# Altium PCB UL-SWAP-DAQ-1.PcbDoc (part 1 of 2)
Units mil, origin at the board's own origin, x right, y up, seen from the top; angles counter-clockwise.
Board outline 2730 x 3320 mil, 4 copper layers (Top Layer, GND, PWR, Bottom Layer), stack 23.756 mil thick; 102 components, 111 nets, 461 pads, 104 vias.
Unrouted connection lines stored in the file: 58.
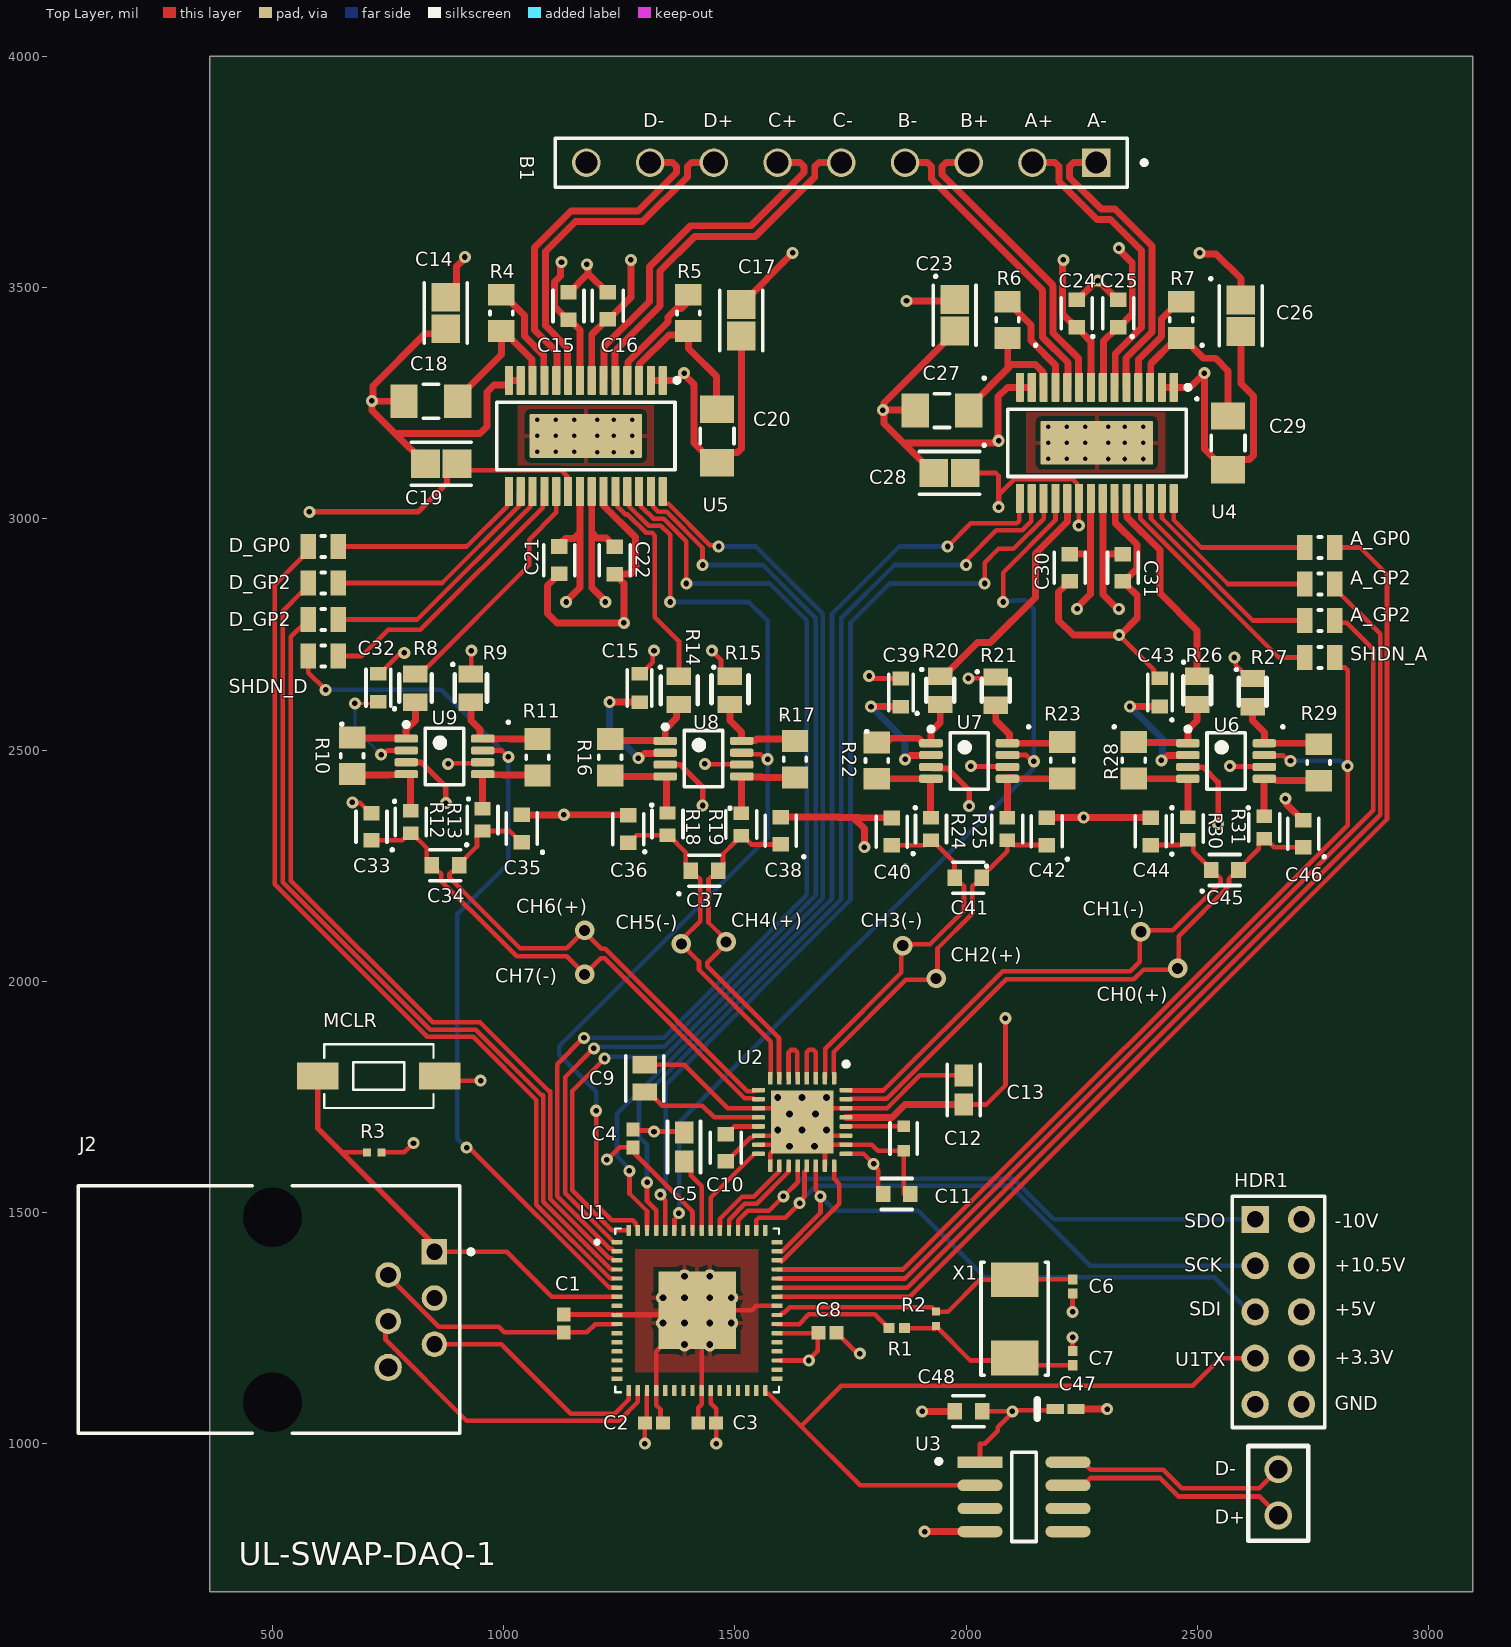
[diagram p0: Top Layer view]
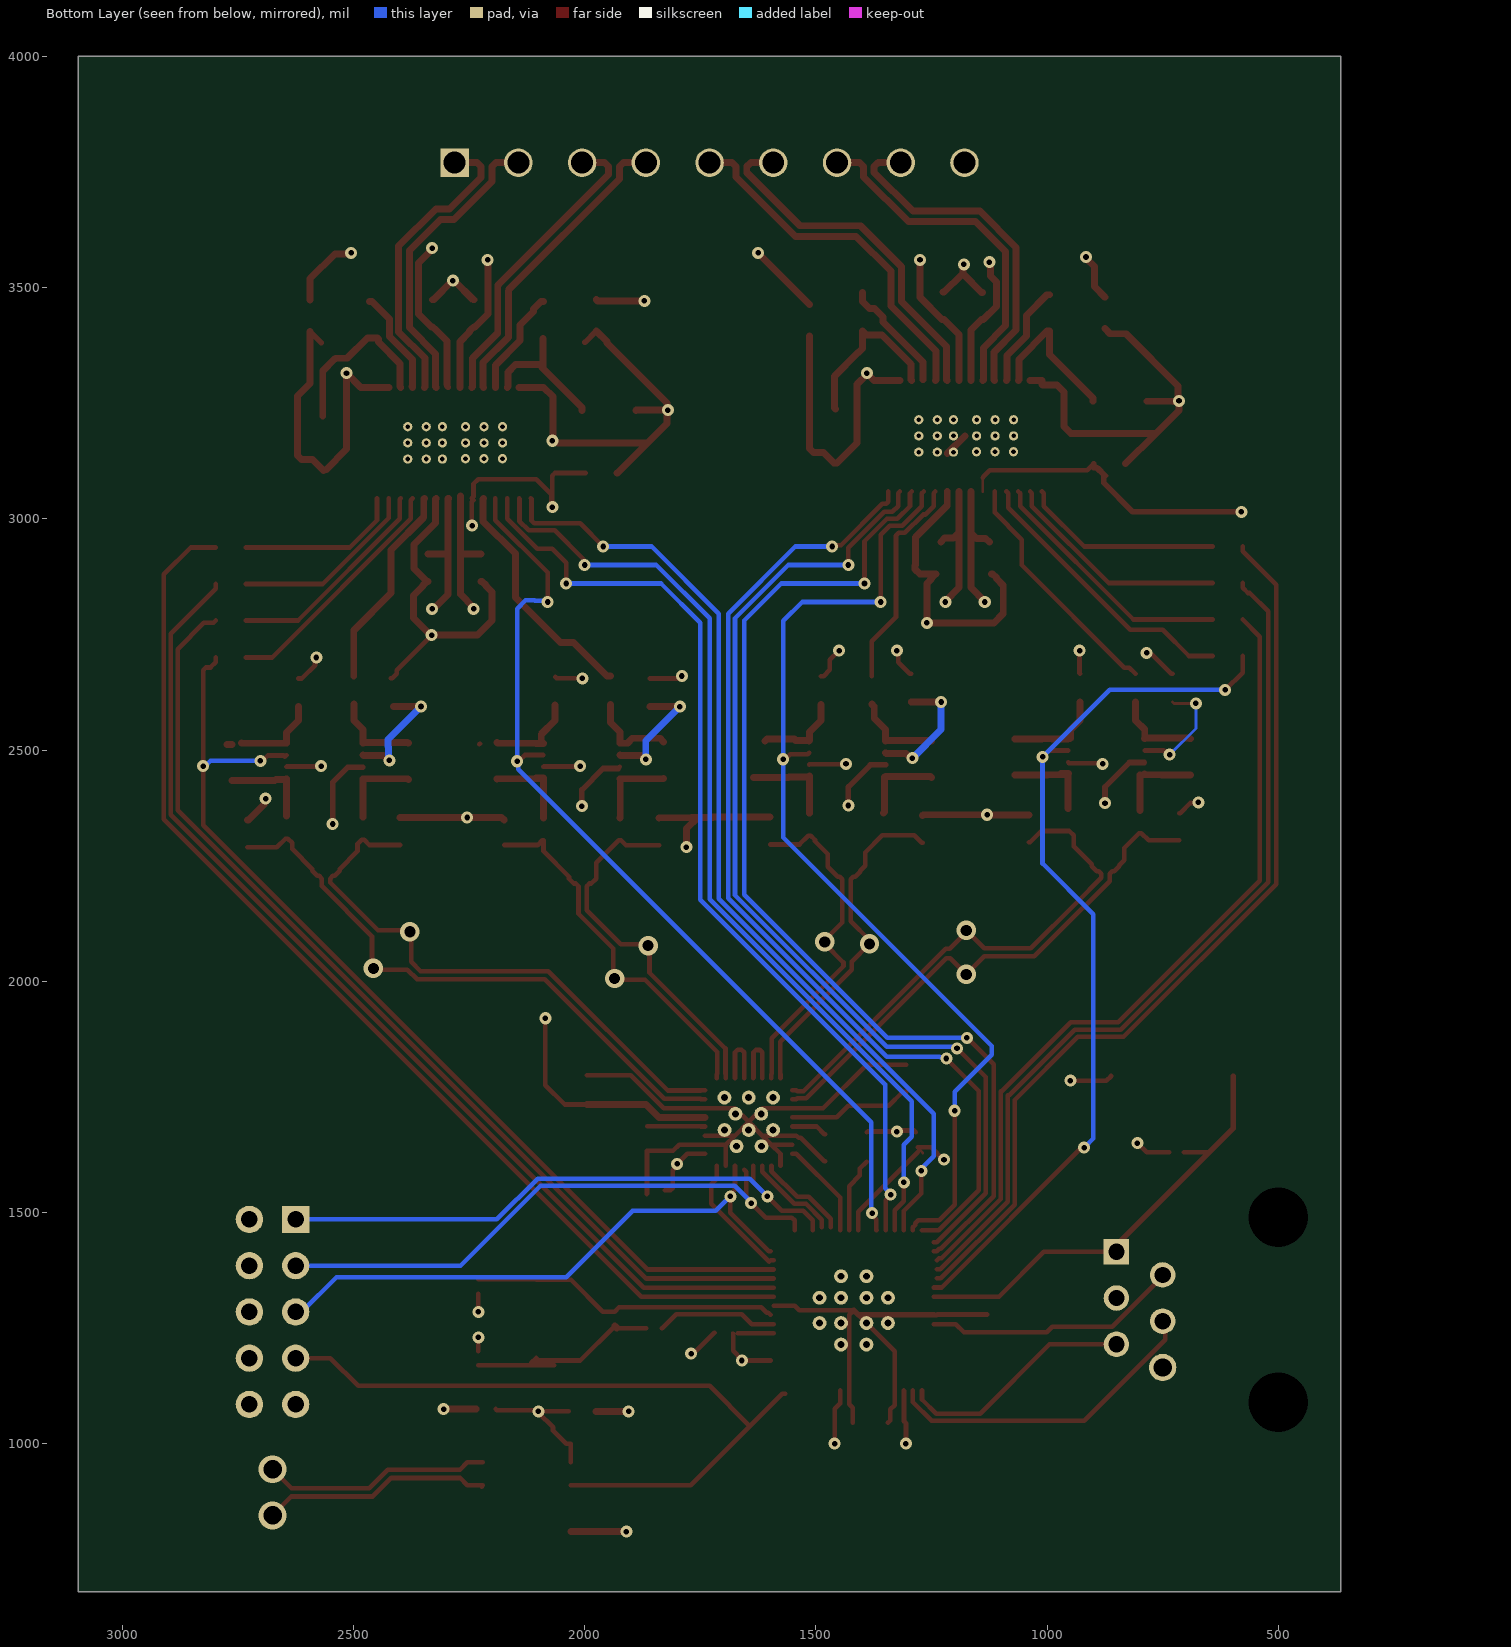
[diagram p1: Bottom Layer view, seen from below]
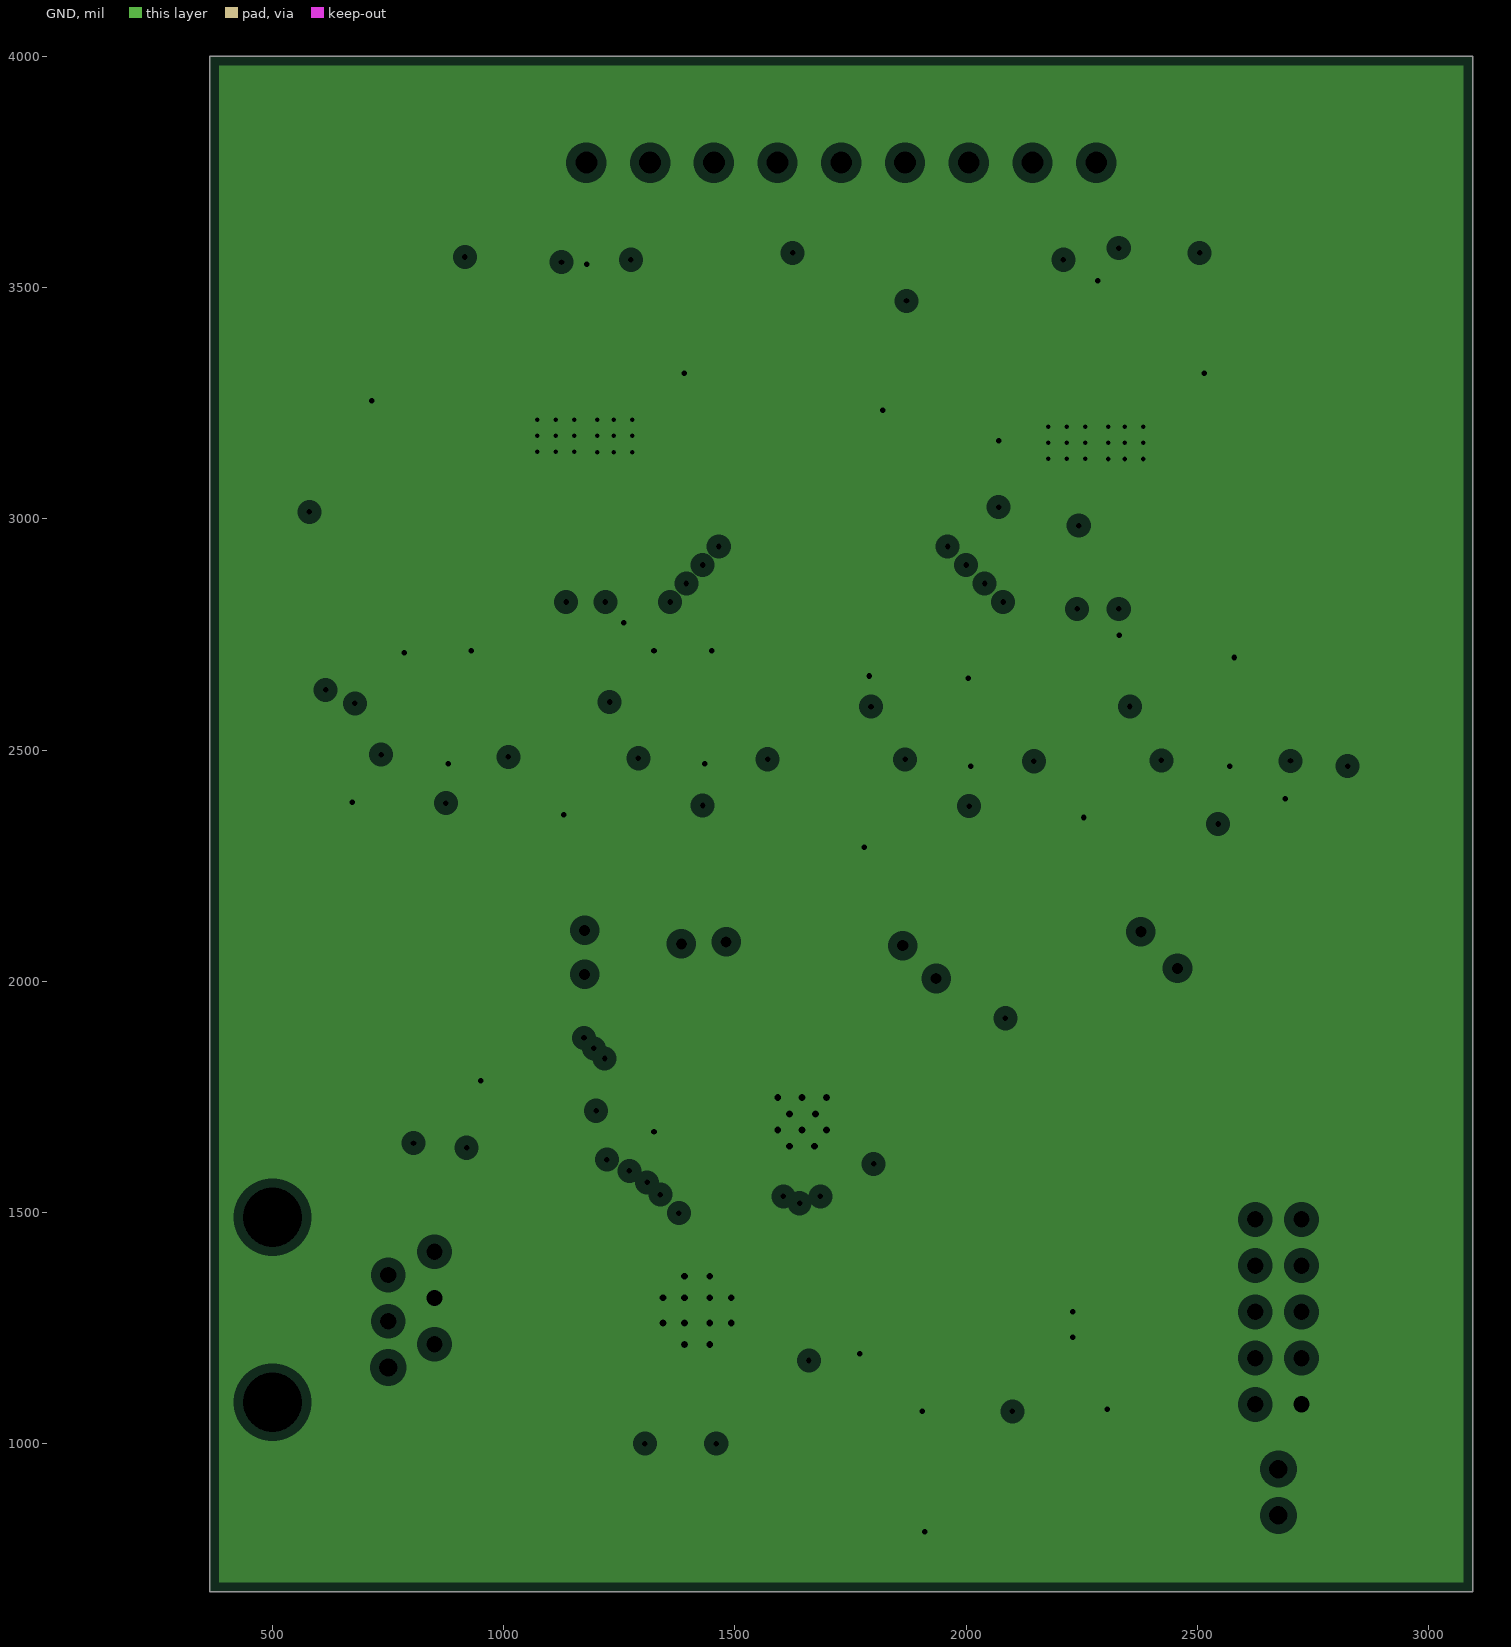
[diagram p2: GND, clearances drawn from the general rule]
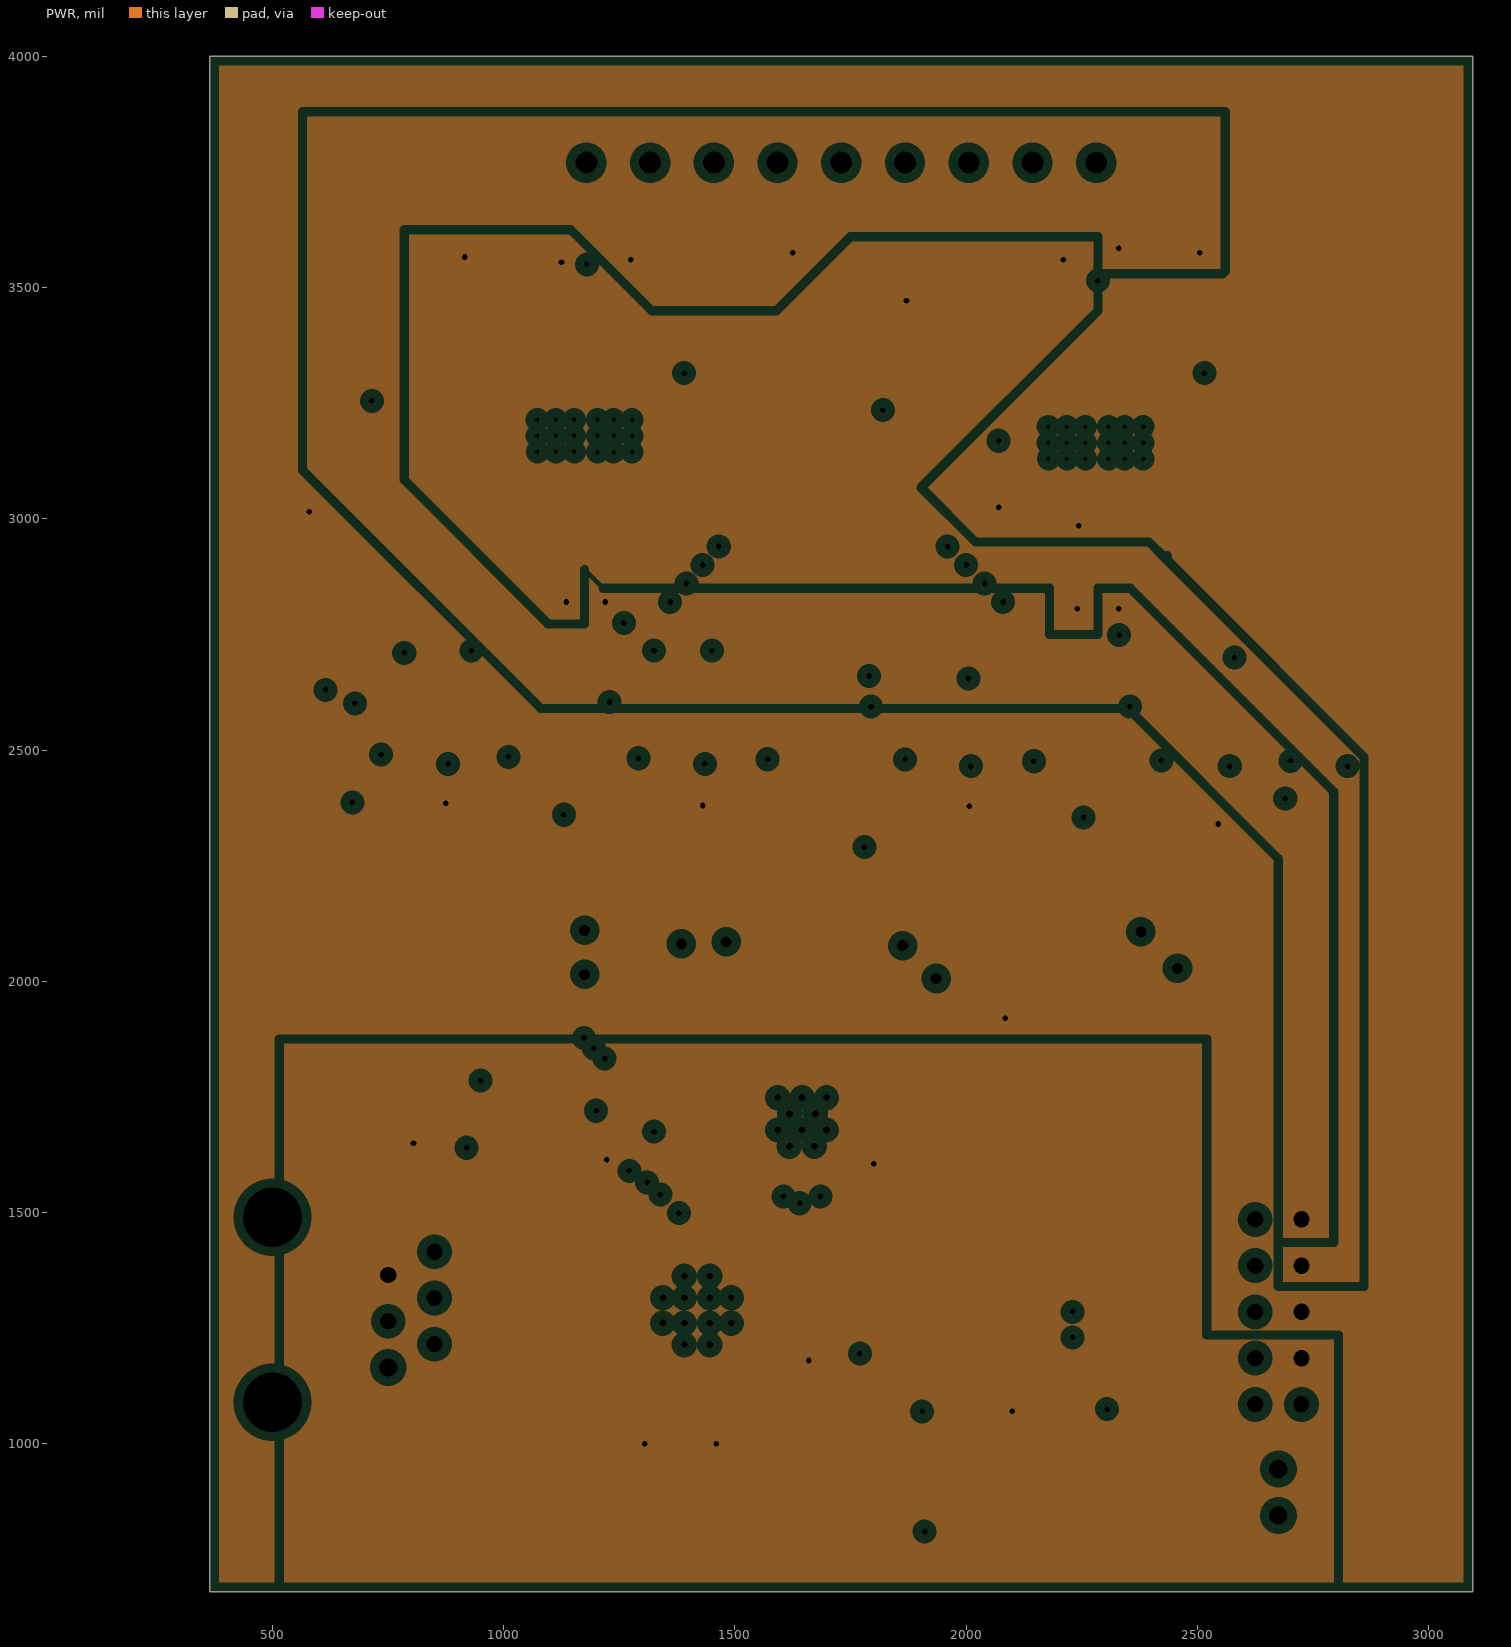
[diagram p3: PWR, clearances drawn from the general rule]
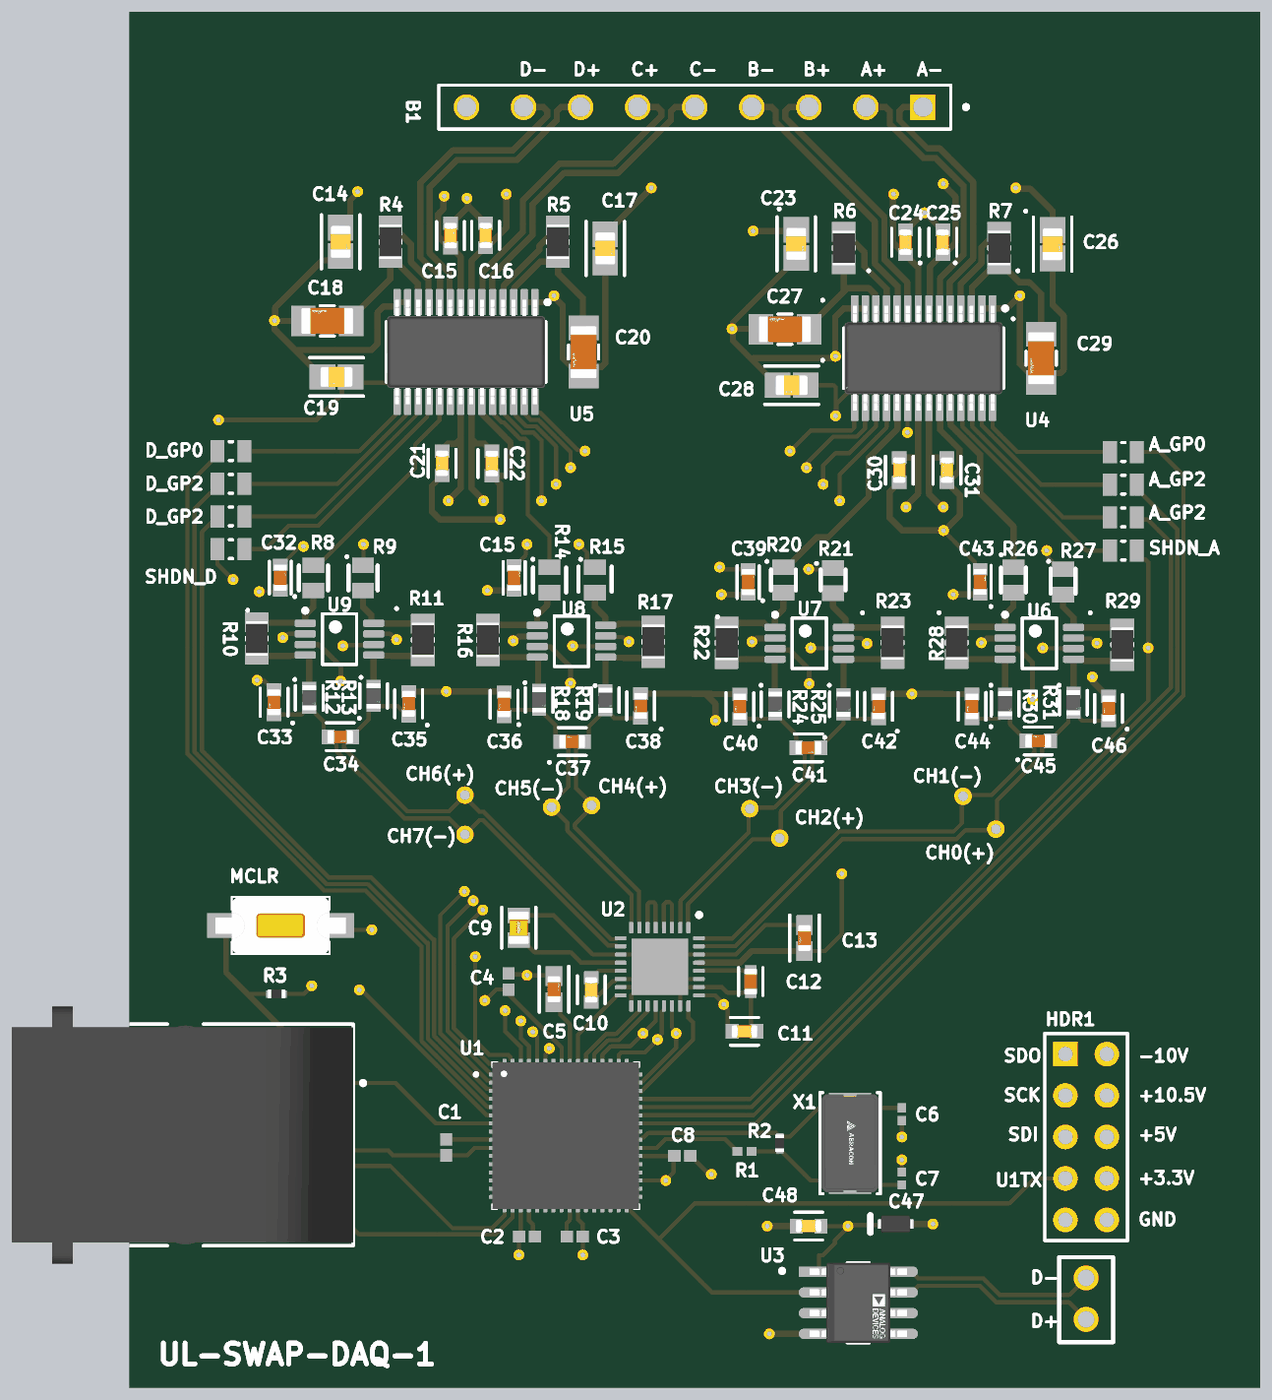
[diagram p5: 3D render of the assembled board from above, using the file's embedded part models]

## Layer stack, top to bottom
Top Solder: solder mask 0.4, Solder Resist, Dk 3.5
Top Layer: signal copper 1.4
Dielectric 2: prepreg 2.8, PP-006, Dk 4.1
GND: plane copper 1.378, net GND
Dielectric 1: dielectric 12.6, FR-4, Dk 4.8
PWR: plane copper 1.378, net (Multiple Nets)
Dielectric 3: prepreg 2.8, PP-006, Dk 4.1
Bottom Layer: signal copper 1.4
Bottom Solder: solder mask 0.4, Solder Resist, Dk 3.5

## Board outline
3095,680 3095,4000 365,4000 365,680

## Design rules (kind name [scope] priority, off if disabled: settings)
Clearance [All] p1: gap=5 ignorepadtopadclearanceinfootprint=FALSE
DiffPairsRouting [All] p1: maxlimit=15 minlimit=5 mostfreqgap=8 toplayer_minwidth=5 toplayer_maxwidth=15 toplayer_prefwidth=6 bottomlayer_minwidth=5 bottomlayer_maxwidth=15 bottomlayer_prefwidth=6 maxuncoupledlength=500
NetAntennae [All] p1: netantennaetolerance=5
PlaneClearance [All] p1: clearance=20
PlaneConnect [All] p1: planeconnectstyle=Direct reliefexpansion=20 reliefentries=4 reliefconductorwidth=10 reliefairgap=10
PolygonConnect [All] p1: connectstyle=Relief reliefconductorwidth=10 reliefentries=4 polygonreliefangle="90 Angle" airgapwidth=10
RoutingVias [All] p1: holewidth=15 width=30 viastyle="Through Hole" minholewidth=10 minwidth=15 maxholewidth=50 maxwidth=100
ShortCircuit [All] p1: allowed=TRUE
SolderMaskExpansion [All] p1: expansion=0 istentingtop=FALSE
UnRoutedNet [All] p1: checkbadconnections=TRUE
Width [All] p1: maxlimit=200 minlimit=5 preferedwidth=10
24 further rules are at their usual default settings.

## Classes and differential pairs
component class ADC_Processor: HDR1
component class Signal_Conditioning: B1
component class PIC32_Subsystem: C1 C2 C3 C4 C5 C6 C7 C8 MCLR R1 R2 R3 U1 X1
component class U5: C14 C15 C16 C17 C18 C19 C20 C21 C22 R4 R5 U5
component class U4: C23 C24 C25 C26 C27 C28 C29 C30 C31 R6 R7 U4
component class LVDS_Driver_Subsystem: U3
component class ICD4_INTERFACE_MODULE: J2
component class U8: C15 C32 C33 C34 C35 C36 C37 C38 R8 R9 R10 R11 R12 R13 R14 R15 R16 R17 R18 R19 U8 U9
component class U6: C39 C40 C41 C42 C43 C44 C45 C46 R20 R21 R22 R23 R24 R25 R26 R27 R28 R29 R30 R31 U7
component class ADC_Subsystem: C9 C10 C11 C12 C13
differential pair Sensor_D: +Sensor_D_P -Sensor_D_N
differential pair Sensor_C: +Sensor_C_P -Sensor_C_N
differential pair Sensor_B: +Sensor_B_P -Sensor_B_N
differential pair Sensor_A: +Sensor_A_P -Sensor_A_N
differential pair DOUT: +DOUT_P -DOUT_N
differential pair ADC_CH6_CH7: +ADC_CH6_CH7_P -ADC_CH6_CH7_N
differential pair ADC_CH4_CH5: +ADC_CH4_CH5_P -ADC_CH4_CH5_N
differential pair ADC_CH2_CH3: +ADC_CH2_CH3_P -ADC_CH2_CH3_N
differential pair ADC_CH0_CH1: +ADC_CH0_CH1_P -ADC_CH0_CH1_N

## Components (designator, comment, footprint, x,y, rotation, side; value= is the part's Value field where it differs from the comment)
A_GP0 "Comment" RESC2013X50X30LL20T20 2765,2937.82 r0 top
A_GP2 "Comment" RESC2013X50X30LL20T20 2765,2780 r0 top
A_GP2 "Comment" RESC2013X50X30LL20T20 2765,2858.91 r0 top
B1 "1945164" FP-4-644456-0-MFG 1730,3770 r180 top
C1 "0.1uF" CAPC1050X55X23ML05T13 1130,1260 r270 top
C2 "0.1uF" CAPC1050X55X23ML05T13 1325,1045 r180 top
C3 "0.1uF" CAPC1050X55X23ML05T13 1440,1045 r0 top
C4 "0.1uF" CAPC1050X55X23ML05T13 1280,1660 r270 top
C5 "10uF" FP-GRM188-0_1-e0_2_0_55-IPC_A 1390,1641.57 r90 top
C6 "18pF" CAPC1005X55X25LL05T10 2230,1340 r270 top
C7 "18pF" CAPC1005X55X25LL05T10 2230,1185 r90 top
C8 "0.1uF" CAPC1050X55X23ML05T13 1700,1240 r180 top
C9 "47uF" FP-C0805C476M9PACTU-MFG 1305,1790 r90 top
C10 "0.1 uF" FP-CC0603-DA-MFG 1480,1640 r270 top value="100 nF"
C11 "0.1 uF" FP-CC0603-DA-MFG 1850,1540 r180 top value="100 nF"
C12 "2.2uF" FP-GRM188-0_1-e0_2_0_5-MFG 1865,1660 r90 top
C13 "10uF" FP-GRM188-0_1-e0_2_0_55-IPC_A 1995,1765 r270 top
C14 "C2012JB1A685K060AC" FP-C2012-060-0_2-IPC_A 875,3445 r270 top
C15 "CC0603KRX7R7BB104" FP-CC0603-DA-MFG 1140.19,3460 r90 top value="100 nF"
C15 "GQM1875C2ER10BB12D" FP-GQM187-0_15-MFG 1293.98,2634.03 r90 top
C16 "CC0603KRX7R7BB104" FP-CC0603-DA-MFG 1225,3460.47 r90 top value="100 nF"
C17 "C2012JB1A685K060AC" FP-C2012-060-0_2-IPC_A 1513.98,3429.03 r270 top
C18 "GRM3195C1H163JA01D" FP-GRM319-0_15-IPC_A 842.66,3254.03 r180 top
C19 "C2012JB1A685K060AC" FP-C2012-060-0_2-IPC_A 864.96,3119.03 r180 top
C20 "GRM3195C1H163JA01D" FP-GRM319-0_15-IPC_A 1461.43,3179.03 r270 top
C21 "CC0603KRX7R7BB104" FP-CC0603-DA-MFG 1120,2910.47 r270 top value="100 nF"
C22 "CC0603KRX7R7BB104" FP-CC0603-DA-MFG 1240,2910 r270 top value="100 nF"
C23 "C2012JB1A685K060AC" FP-C2012-060-0_2-IPC_A 1975,3440 r270 top
C24 "CC0603KRX7R7BB104" FP-CC0603-DA-MFG 2238.98,3444.03 r90 top value="100 nF"
C25 "CC0603KRX7R7BB104" FP-CC0603-DA-MFG 2328.98,3444.03 r90 top value="100 nF"
C26 "C2012JB1A685K060AC" FP-C2012-060-0_2-IPC_A 2593.98,3439.03 r270 top
C27 "GRM3195C1H163JA01D" FP-GRM319-0_15-IPC_A 1947.66,3234.03 r180 top
C28 "C2012JB1A685K060AC" FP-C2012-060-0_2-IPC_A 1963.98,3099.03 r180 top
C29 "GRM3195C1H163JA01D" FP-GRM319-0_15-IPC_A 2566.43,3164.03 r270 top
C30 "CC0603KRX7R7BB104" FP-CC0603-DA-MFG 2223.98,2894.03 r270 top value="100 nF"
C31 "CC0603KRX7R7BB104" FP-CC0603-DA-MFG 2338.98,2894.03 r270 top value="100 nF"
C32 "GQM1875C2ER10BB12D" FP-GQM187-0_15-MFG 728.98,2634.56 r90 top
C33 "CC0603KRX7R9BB392" FP-CC0603-DA-MFG 714.16,2334.03 r90 top
C34 "CC0603KRX7R9BB392" FP-CC0603-DA-MFG 873.98,2250.6 r180 top
C35 "CC0603KRX7R9BB392" FP-CC0603-DA-MFG 1039.19,2330.32 r90 top
C36 "CC0603KRX7R9BB392" FP-CC0603-DA-MFG 1269.38,2329.03 r90 top
C37 "CC0603KRX7R9BB392" FP-CC0603-DA-MFG 1433.98,2239.03 r0 top
C38 "CC0603KRX7R9BB392" FP-CC0603-DA-MFG 1599.19,2325.32 r90 top
C39 "GQM1875C2ER10BB12D" FP-GQM187-0_15-MFG 1858.98,2624.03 r90 top
C40 "CC0603KRX7R9BB392" FP-CC0603-DA-MFG 1838.98,2323.5 r90 top
C41 "CC0603KRX7R9BB392" FP-CC0603-DA-MFG 2004.45,2224.03 r180 top
C42 "CC0603KRX7R9BB392" FP-CC0603-DA-MFG 2173.98,2324.03 r90 top
C43 "GQM1875C2ER10BB12D" FP-GQM187-0_15-MFG 2418.98,2624.56 r90 top
C44 "CC0603KRX7R9BB392" FP-CC0603-DA-MFG 2399.38,2324.03 r90 top
C45 "CC0603KRX7R9BB392" FP-CC0603-DA-MFG 2559.38,2240.6 r0 top
C46 "CC0603KRX7R9BB392" FP-CC0603-DA-MFG 2729.19,2319.03 r90 top
C47 "10 uF" VISH-TR8-M_L 2215,1075 r0 top
C48 "0.1 uF" FP-CC0603-DA-MFG 2005,1070 r180 top value="100 nF"
D_GP0 "Comment" RESC2013X50X30LL20T20 610,2940 r180 top
D_GP2 "Comment" RESC2013X50X30LL20T20 610,2861.09 r180 top
D_GP2 "Comment" RESC2013X50X30LL20T20 610,2782.18 r180 top
HDR1 "Header 2x5" HDR2X5 2625,1485 r270 top
J2 "5520470-3" TECO-5520470-3_V 555,1290 r270 top
MCLR "434121043816" 434121043816 730,1795 r180 top
R1 "0R" RESC1005X40X25NL05T10 1850,1250 r0 top
R2 "1M" RESC1005X40X25LL05T05 1935,1270 r270 top
R3 "10k" RESC1005X40X25LL05T05 720,1630 r0 top
R4 "RC0805FR-071KL" RESC2013X60X35ML10T20 995,3445.03 r90 top
R5 "RC0805FR-071KL" RESC2013X60X35ML10T20 1399.51,3445.03 r90 top
R6 "RC0805FR-071KL" RESC2013X60X35ML10T20 2089.46,3430.03 r90 top
R7 "RC0805FR-071KL" RESC2013X60X35ML10T20 2465,3430.03 r90 top
R8 "ERJ-6ENF1241V" RESC2013X70X40LL20T20 808.98,2634.03 r270 top
R9 "ERJ-6ENF1241V" RESC2013X70X40LL20T20 928.98,2634.03 r270 top
R10 "RC0805FR-071KL" RESC2013X60X35ML10T20 672.35,2487.74 r270 top
R11 "RC0805FR-071KL" RESC2013X60X35ML10T20 1073.14,2484.28 r270 top
R12 "CRCW060335K7FKEA" FP-CRCW0603-e3-IPC_C 798.98,2344.58 r270 top
R13 "CRCW060335K7FKEA" FP-CRCW0603-e3-IPC_C 954.38,2349.03 r270 top
R14 "ERJ-6ENF1241V" RESC2013X70X40LL20T20 1378.98,2629.03 r270 top
R15 "ERJ-6ENF1241V" RESC2013X70X40LL20T20 1488.98,2629.03 r270 top
R16 "RC0805FR-071KL" RESC2013X60X35ML10T20 1230.1,2484.28 r270 top
R17 "RC0805FR-071KL" RESC2013X60X35ML10T20 1630,2480 r270 top
R18 "CRCW060335K7FKEA" FP-CRCW0603-e3-IPC_C 1354.19,2339.58 r270 top
R19 "CRCW060335K7FKEA" FP-CRCW0603-e3-IPC_C 1513.98,2339.03 r270 top
R20 "ERJ-6ENF1241V" RESC2013X70X40LL20T20 1943.98,2629.03 r270 top
R21 "ERJ-6ENF1241V" RESC2013X70X40LL20T20 2063.98,2627.46 r270 top
R22 "RC0805FR-071KL" RESC2013X60X35ML10T20 1806.84,2477.21 r270 top
R23 "RC0805FR-071KL" RESC2013X60X35ML10T20 2207.7,2477.74 r270 top
R24 "CRCW060335K7FKEA" FP-CRCW0603-e3-IPC_C 1923.98,2329.03 r270 top
R25 "CRCW060335K7FKEA" FP-CRCW0603-e3-IPC_C 2088.98,2329.03 r270 top
R26 "ERJ-6ENF1241V" RESC2013X70X40LL20T20 2499.38,2629.03 r270 top
R27 "ERJ-6ENF1241V" RESC2013X70X40LL20T20 2619.38,2624.03 r270 top
R28 "RC0805FR-071KL" RESC2013X60X35ML10T20 2362.46,2477.74 r270 top
R29 "RC0805FR-071KL" RESC2013X60X35ML10T20 2762.16,2472.97 r270 top
R30 "CRCW060335K7FKEA" FP-CRCW0603-e3-IPC_C 2479.38,2330.33 r270 top
R31 "CRCW060335K7FKEA" FP-CRCW0603-e3-IPC_C 2644.38,2332.73 r270 top
SHDN_A "Comment" RESC2013X50X30LL20T20 2765,2700 r0 top
SHDN_D "Comment" RESC2013X50X30LL20T20 610,2703.28 r180 top
U1 "PIC32MX470-F512H-120MR" QFN50P900X900X100-65N 1418.23,1288.27 r0 top
U2 "" LTC_2373_Footprint 1645.51,1695.79 r270 top
U3 "ADN4661BRZ" FP-R-8-IPC_A 2125,885 r0 top
U4 "THS7002CPWP" THS7002CPWP#1 2282.64,3164.11 r270 top locked
U5 "THS7002CPWP" THS7002CPWP#2 1177.64,3179.11 r270 top locked
U6 "LTC6362HMS8#PBF" LT-MS8-8_L 2562.06,2476.24 r0 top
U7 "LTC6362HMS8#PBF" LT-MS8-8_L 2006.65,2476.24 r0 top
U8 "LTC6362HMS8#PBF" LT-MS8-8_L 1432.06,2481.24 r0 top
U9 "LTC6362HMS8#PBF" LT-MS8-8_L 872.06,2486.24 r0 top
X1 "20MHz" FP-ABM7-MFG 2105,1270 r270 top

## Footprints (in the part's own frame and the unit in brackets; to place one, negate y for a bottom-side part, rotate by r counter-clockwise, add the part's x,y. Pads: shape width x height; smd on the part's side, far side on the other; paste and mask are expansions set on the pad)
434121043816 [mm] "6.0*3.5mm vertical type, SMD, height 4.3mm, black actuator, 160gf, T&R"
  rect 2.3x1.5 smd: 1(-3.35,0) 2(3.35,0)
  silkscreen extent -3,-1.75 3,1.75, body extent -4,-1.75 4,1.75, height 4.3
CAPC1005X55X25LL05T10 [mm] "Chip Capacitor, 2-Leads, Body 1.00x0.50mm, IPC High Density"
  rect 0.56x0.52 smd: 1(-0.39,0) 2(0.39,0)
  body extent -0.53,-0.28 0.53,0.28, height 0.55
CAPC1050X55X23ML05T13 [mm] "Chip Capacitor, 2-Leads, Body 1.05x0.55mm, IPC Low Density"
  rect 0.76x0.72 smd: 1(-0.49,0) 2(0.49,0)
  body extent -0.53,-0.28 0.53,0.27, height 0.55
FP-4-644456-0-MFG [mm] "Connector; Header; 8 Position"
  rect 1.566x1.566 hole 1.2 mask+0: 1(-14,0)
  round 1.566 hole 1.2 mask+0: 2(-10.5,0) 3(-7,0) 4(-3.5,0) 5(0,0) 6(3.5,0) 7(7,0) 8(10.5,0) 9(14,0)
  silkscreen extent -16.76,-1.35 15.7,1.35
FP-ABM7-MFG [mm]
  rect 1.9x2.6 smd paste+0 mask+0: 1(-2.15,0) 2(2.15,0)
  silkscreen extent -3.1,-1.85 3.1,1.85, body extent -3.2,-1.95 3.2,1.95, height 0.25
FP-C0805C476M9PACTU-MFG [mm]
  rect 0.95x1.35 smd paste+0 mask+0: 1(-0.75,0) 2(0.75,0)
  silkscreen extent -1.25,-1.05 1.25,1.05, body extent -1.4,-0.85 1.4,0.85, height 0.25
FP-C2012-060-0_2-IPC_A [mil]
  rect 62.13x61.27 smd paste+0 mask+0: 1(-34.02,0) 2(34.02,0)
  silkscreen extent -65,-46 65,46, body extent -85,-50 85,50, height 10
FP-CC0603-DA-MFG [mm]
  rect 0.8x0.9 smd paste+0 mask+0: 1(-0.75,0) 2(0.75,0)
  silkscreen extent -0.85,-0.85 0.85,0.85, body extent -1.35,-0.75 1.35,0.75, height 0.25
FP-CRCW0603-e3-IPC_C [mil]
  rect 28.94x33.94 smd paste+0 mask+0: 1(-24.23,0) 2(24.23,0)
  silkscreen extent -30,-33 30,33, body extent -43,-23 43,23, height 10
FP-GQM187-0_15-MFG [mm]
  rect 0.75x0.9 smd paste+0 mask+0: 1(-0.775,0) 2(0.775,0)
  silkscreen extent -1,-0.68 1,0.67, body extent -1.25,-0.58 1.25,0.58, height 0.25
FP-GRM188-0_1-e0_2_0_5-MFG [mm]
  rect 0.65x0.7 smd paste+0 mask+0: 1(-0.675,0) 2(0.675,0)
  silkscreen extent -0.85,-0.75 0.85,0.75, body extent -1.1,-0.55 1.1,0.55, height 0.25
FP-GRM188-0_1-e0_2_0_55-IPC_A [mil]
  rect 47.57x39.85 smd paste+0 mask+0: 1(-31.57,0) 2(31.57,0)
  silkscreen extent -55,-36 55,36, body extent -75,-40 75,40, height 10
FP-GRM319-0_15-IPC_A [mil] "Chip Capacitor, 2-Leads, Body 1.05x0.55mm, IPC Low Density"
  rect 59.28x73.16 smd paste+0 mask+0: 1(-58.12,0) 2(58.12,0)
  silkscreen extent -17,-37 17,37, body extent -107,-56 107,56, height 10
FP-R-8-IPC_A [mil]
  rect 97.4x24.49 smd paste+0 mask+0: 1(-95.12,75)
  rrect100% 97.4x24.49 smd paste+0 mask+0: 2(-95.12,25) 3(-95.12,-25) 4(-95.12,-75) 5(95.12,-75) 6(95.12,-25) 7(95.12,25) 8(95.12,75)
  silkscreen extent -189,-96 27,96, body extent -164,-116 164,116, height 10
HDR2X5 [mm] "Connector; Header; 5x2 Position"
  rect 1.5x1.5 hole 0.9: 1(0,0)
  round 1.5 hole 0.9: 2(0,2.54) 3(2.54,0) 4(2.54,2.54) 5(5.08,0) 6(5.08,2.54) 7(7.62,0) 8(7.62,2.54) 9(10.16,0) 10(10.16,2.54)
  silkscreen extent -1.27,-1.27 11.43,3.81
LT-MS8-8_L [mm] "SOP, 8-Leads, Body 3x3mm, Pitch 0.65mm, IPC High Density"
  rrect50% 1.3x0.45 smd: 1(-2.1,0.975) 2(-2.1,0.325) 3(-2.1,-0.325) 4(-2.1,-0.975) 5(2.1,-0.975) 6(2.1,-0.325) 7(2.1,0.325) 8(2.1,0.975)
  silkscreen extent -2.22,-1.55 1.05,1.87, body extent -1.55,-1.55 1.55,1.55, height 1.1
LTC_2373_Footprint [mm]
  rrect40% 0.7x0.25 smd: 1(-2.4,1.75) 2(-2.4,1.25) 3(-2.4,0.75) 4(-2.4,0.25) 5(-2.4,-0.25) 6(-2.4,-0.75) 7(-2.4,-1.25) 8(-2.4,-1.75) 17(2.4,-1.75) 18(2.4,-1.25) 19(2.4,-0.75) 20(2.4,-0.25) 21(2.4,0.25) 22(2.4,0.75) 23(2.4,1.25) 24(2.4,1.75)
  rrect40% 0.25x0.7 smd: 9(-1.75,-2.4) 10(-1.25,-2.4) 11(-0.75,-2.4) 12(-0.25,-2.4) 13(0.25,-2.4) 14(0.75,-2.4) 15(1.25,-2.4) 16(1.75,-2.4) 25(1.75,2.4) 26(1.25,2.4) 27(0.75,2.4) 28(0.25,2.4) 29(-0.25,2.4) 30(-0.75,2.4) 31(-1.25,2.4) 32(-1.75,2.4)
  rect 3.45x3.45 smd: 33(0,0)
  silkscreen extent -3.3,2.29 -3.05,2.54, body extent -2.54,-2.54 2.54,2.54, height 0.81
QFN50P900X900X100-65N [mm]
  rrect25% 0.6x0.24 smd: 1(-4.4,3.75) 2(-4.4,3.25) 3(-4.4,2.75) 4(-4.4,2.25) 5(-4.4,1.75) 6(-4.4,1.25) 7(-4.4,0.75) 8(-4.4,0.25) 9(-4.4,-0.25) 10(-4.4,-0.75) 11(-4.4,-1.25) 12(-4.4,-1.75) 13(-4.4,-2.25) 14(-4.4,-2.75) 15(-4.4,-3.25) 16(-4.4,-3.75) 33(4.4,-3.75) 34(4.4,-3.25) 35(4.4,-2.75) 36(4.4,-2.25) 37(4.4,-1.75) 38(4.4,-1.25) 39(4.4,-0.75) 40(4.4,-0.25) 41(4.4,0.25) 42(4.4,0.75) 43(4.4,1.25) 44(4.4,1.75) 45(4.4,2.25) 46(4.4,2.75) 47(4.4,3.25) 48(4.4,3.75)
  rrect25% 0.24x0.6 smd: 17(-3.75,-4.4) 18(-3.25,-4.4) 19(-2.75,-4.4) 20(-2.25,-4.4) 21(-1.75,-4.4) 22(-1.25,-4.4) 23(-0.75,-4.4) 24(-0.25,-4.4) 25(0.25,-4.4) 26(0.75,-4.4) 27(1.25,-4.4) 28(1.75,-4.4) 29(2.25,-4.4) 30(2.75,-4.4) 31(3.25,-4.4) 32(3.75,-4.4) 49(3.75,4.4) 50(3.25,4.4) 51(2.75,4.4) 52(2.25,4.4) 53(1.75,4.4) 54(1.25,4.4) 55(0.75,4.4) 56(0.25,4.4) 57(-0.25,4.4) 58(-0.75,4.4) 59(-1.25,4.4) 60(-1.75,4.4) 61(-2.25,4.4) 62(-2.75,4.4) 63(-3.25,4.4) 64(-3.75,4.4)
  rect 4.25x4.25 smd paste-1.53: 65(0,0)
  round 0.762 hole 0.381 mask+0: 66(-0.695,1.875) 67(0.695,1.875) 68(-1.875,0.695) 69(-0.695,0.695) 70(0.695,0.695) 71(1.875,0.695) 72(-1.875,-0.695) 73(-0.695,-0.695) 74(0.695,-0.695) 75(1.875,-0.695) 76(-0.695,-1.875) 77(0.695,-1.875)
  silkscreen extent -5.59,-4.5 4.5,4.5, body extent -4.5,-4.5 4.5,4.5, height 1
RESC1005X40X25LL05T05 [mm] "Chip Resistor, 2-Leads, Body 1.05x0.55mm, IPC High Density"
  rect 0.45x0.45 smd: 1(-0.4,0) 2(0.4,0)
  body extent -0.53,-0.28 0.53,0.28, height 0.4
RESC1005X40X25NL05T10 [mm] "Chip Resistor, 2-Leads, Body 1.00x0.50mm, IPC Medium Density"
  rect 0.6x0.55 smd: 1(-0.425,0) 2(0.425,0)
  body extent -0.53,-0.27 0.53,0.28, height 0.4
RESC2013X50X30LL20T20 [mm] "Chip Resistor, 2-Leads, Body 2.00x1.25mm, IPC High Density"
  rect 0.85x1.35 smd: 1(-0.825,0) 2(0.825,0)
  silkscreen extent -0.1,-0.58 0.1,0.58, body extent -1.1,-0.72 1.1,0.72, height 0.5
RESC2013X60X35ML10T20 [mm] "Chip Resistor, 2-Leads, Body 2.1x1.35mm, IPC Low Density"
  rect 1.2x1.45 smd: 1(-1,0) 2(1,0)
  silkscreen extent -0.1,-0.63 0.1,0.63, body extent -1.05,-0.68 1.05,0.67, height 0.6
RESC2013X70X40LL20T20 [mm] "Chip Resistor, 2-Leads, Body 2.00x1.25mm, IPC High Density"
  rect 0.95x1.35 smd: 1(-0.775,0) 2(0.775,0)
  body extent -1.1,-0.72 1.1,0.72, height 0.7
TECO-5520470-3_V [mm] "THD, 6-Leads, Body 20.96x13.59mm, Pitch 1.27mm"
  rect 1.4x1.4 hole 0.89: 1(-3.175,7.5)
  round 1.4 hole 0.89: 2(-1.905,4.96) 3(-0.635,7.5) 4(0.635,4.96) 5(1.905,7.5)
  round 1.5 hole 1: 6(3.175,4.96)
  round 3 hole 3.25 unplated: MH1(-5.075,-1.39) MH2(5.085,-1.39)
  silkscreen extent -6.8,-12.06 6.8,9.62, body extent -7.87,-12.06 7.87,8.9, height 16.04
THS7002CPWP#1 [mm] "SOP, 28-leads, Body 4.5x9.8mm, Pitch 0.65mm, Thermal Pad 2.4x6.17mm, IPC Low Density"
  rrect22% 1.6x0.45 smd: 1(-3.05,4.225) 2(-3.05,3.575) 3(-3.05,2.925) 4(-3.05,2.275) 5(-3.05,1.625) 6(-3.05,0.975) 7(-3.05,0.325) 8(-3.05,-0.325) 9(-3.05,-0.975) 10(-3.05,-1.625) 11(-3.05,-2.275) 12(-3.05,-2.925) 13(-3.05,-3.575) 14(-3.05,-4.225) 15(3.05,-4.225) 16(3.05,-3.575) 17(3.05,-2.925) 18(3.05,-2.275) 19(3.05,-1.625) 20(3.05,-0.975) 21(3.05,-0.325) 22(3.05,0.325) 23(3.05,0.975) 24(3.05,1.625) 25(3.05,2.275) 26(3.05,2.925) 27(3.05,3.575) 28(3.05,4.225)
  rrect4% 2.4x6.17 smd: 29(0,0)
  round 0.508 hole 0.254: 30(-0.889,-2.667) 31(-0.889,-1.651) 32(-0.889,-0.635) 33(-0.889,0.635) 34(-0.889,1.524) 35(-0.889,2.54) 36(0,-2.667) 37(0,-1.651) 38(0,-0.635) 39(0,0.635) 40(0,1.524) 41(0,2.54) 42(0.87,-2.661) 43(0.87,-1.645) 44(0.87,-0.629) 45(0.889,0.635) 46(0.889,1.524) 47(0.889,2.54)
  silkscreen extent -3.17,-4.9 1.85,5.13, body extent -3.21,-4.85 3.21,4.85, height 0.98
THS7002CPWP#2 [mm] "SOP, 28-leads, Body 4.5x9.8mm, Pitch 0.65mm, Thermal Pad 2.4x6.17mm, IPC Low Density"
  rrect22% 1.6x0.45 smd: 1(-3.05,4.225) 2(-3.05,3.575) 3(-3.05,2.925) 4(-3.05,2.275) 5(-3.05,1.625) 6(-3.05,0.975) 7(-3.05,0.325) 8(-3.05,-0.325) 9(-3.05,-0.975) 10(-3.05,-1.625) 11(-3.05,-2.275) 12(-3.05,-2.925) 13(-3.05,-3.575) 14(-3.05,-4.225) 15(3.05,-4.225) 16(3.05,-3.575) 17(3.05,-2.925) 18(3.05,-2.275) 19(3.05,-1.625) 20(3.05,-0.975) 21(3.05,-0.325) 22(3.05,0.325) 23(3.05,0.975) 24(3.05,1.625) 25(3.05,2.275) 26(3.05,2.925) 27(3.05,3.575) 28(3.05,4.225)
  round 0.508 hole 0.254: 29(-0.889,2.54) 29(-0.889,1.524) 29(-0.889,0.635) 29(-0.889,-0.635) 29(-0.889,-1.651) 29(-0.889,-2.667) 29(0,2.54) 29(0,1.524) 29(0,0.635) 29(0,-0.635) 29(0,-1.651) 29(0,-2.667) 29(0.87,-0.629) 29(0.87,-1.645) 29(0.87,-2.661) 29(0.889,2.54) 29(0.889,1.524) 29(0.889,0.635)
  rrect4% 2.4x6.17 smd: 29(0,0)
  silkscreen extent -3.17,-4.9 1.85,5.13, body extent -3.21,-4.85 3.21,4.85, height 0.98
VISH-TR8-M_L [mm] "Molded Capacitor, 2-Leads, Body 1.8x1.05mm, IPC High Density"
  rect 0.95x0.55 smd: 1(-0.575,0) 2(0.575,0)
  silkscreen extent -1.55,-0.53 -1.55,0.53, body extent -1.12,-0.53 1.12,0.53, height 0.9

## Part data
B1: library part CMP-03369-000038-1, "CONN HEADER VERT 9POS 3.5MM", Current Rating=5A, Manufacturer="TE Connectivity", Manufacturer Part Number=4-644456-0, Temperature="-55°C to +105°C", Temperature Range High=+105°C, Temperature Range Low=-55°C, Voltage Rating=250V, Automotive=No, Category=Conn, ComponentLink2Description=Datasheet, ComponentLink2URL=https://www.te.com/commerce/DocumentDelivery/DDEController?Action=showdoc&DocId=Data+Sheet%7F82056_MTA%7F0818%7Fpdf%7FEnglish%7FENG_DS_82056_MTA_0818.pdf%7F4-644456-0, Conn Gender=Male, Conn Orientation=Vertical, Contact Material=Tin, Device Class L1=Connectors, Device Class L2="Headers and Wire Housings", Device Class L3=unset, Digikey Description="CONN HEADER VERT 10POS 2.54MM", Footprint Url=https://www.te.com/commerce/DocumentDelivery/DDEController?Action=showdoc&DocId=Customer+Drawing%7F644456%7FD2%7Fpdf%7FEnglish%7FENG_CD_644456_D2.pdf%7F4-644456-0, Height=0.408inch, Lead Free=Yes, Mouser Description="Headers & Wire Housings NARROW FLT HDR 10P Straight Post", Number Of Contacts=10, Number of Rows=1, Octopart=https://octopart.com/4-644456-0-te+connectivity-39514173, Package=4-644456-0, Pitch=2.54mm, RoHS=TRUE
C1 C2 C3 C4 C8: library part CMP-2000-05439-1, "Chip Capacitor, 100 nF, +/- 10%, 16 V, -55 to 125 degC, 0402 (1005 Metric), RoHS, Tape and Reel / CL05B104KO5NNNC", Capacitance=100000pF, Case Size/Dimension=0402, Dielectric=X7R, Manufacturer="Samsung Electro-Mechanics", Rated Voltage=16V, Tolerance (%)=±10%, Datasheet URL=https://datasheet.ciiva.com/29198/458718-da-01-en-vs-kondensator-0402-29198423.pdf, Datasheet Version=Nov-10, Manufacturer URL=http://www.samsungsem.com/global/index.jsp
C5 C13: library part CMP-2006-02792-2, "Chip Multilayer Ceramic Capacitors for General Purpose, 0603, 10uF, X5R, 15%, 20%, 6.3V / GRM188R60J106ME47D", Case Code (Imperial)=0603, Case Code (Metric)=1608, Dielectric=X5R, Max Operating Temperature=85°C, Min Operating Temperature=-55°C, Package Quantity=4000, Tolerance=20%, Voltage=6.3V, Capacitance=10uF, Case/Package=0603, Depth=0.8mm, Height=0.8mm, Lead Free="Lead Free", Length=1.6mm, Material=Ceramic, Mount="Surface Mount", Packaging="Tape and Reel", Radiation Hardening=No, REACH SVHC="No SVHC", Termination=SMD/SMT, Thickness=0.035inch, Voltage Rating=6.3V, Voltage Rating (DC)=6.3V, Width=0.031inch
C6 C7: library part CMP-2008-04271-1, "GRM1555C1H180GA01D", Manufacturer=Murata, Part Number=GRM1555C1H180GA01D
C9: library part CMP-2007-01008-2, "CAP CER 47UF 6.3V X5R 0805 / C0805C476M9PACTU", Case Code (Imperial)=0805, Case Code (Metric)=2012, Dielectric=X5R, Dielectric Material=Ceramic, Max Operating Temperature=85°C, Min Operating Temperature=-55°C, Package Quantity=3000, Tolerance=20%, Voltage=6.3V, Capacitance=47uF, Case/Package=0805, Construction=Flat, Depth=1.25mm, Dissipation Factor=5%, Height=1.25mm, Length=2mm, Mount=PCB, Number of Pins=2, Packaging="Tape and Reel", Radiation Hardening=No, REACH SVHC="No SVHC", RoHS Compliant=Yes, Series=C0805C, Termination=SMD/SMT, Voltage Rating=6.3V, Voltage Rating (DC)=6.3V, Width=1.2mm
C10 C11 C48: library part CMP-2000-05002-2, "CAP CER 0.1UF 16V X7R 0603 CC0603KRX7R7BB104", Capacitance="100 nF", Manufacturer=YAGEO, Manufacturer Part Number=CC0603KRX7R7BB104, Package=CC0603-DA, Temperature="-55°C to +125°C", Temperature Characteristic=X7R, Temperature Coefficient=15%, Temperature Range High=+125°C, Temperature Range Low=-55°C, Tolerance=0.1, Voltage="16 V", Automotive=No, Category=Cap, ComponentLink2Description=Datasheet, ComponentLink2URL=http://www.yageo.com/documents/recent/UPY-GPHC_X7R_6.3V-to-50V_18.pdf, Device Class L1="Passive Components", Device Class L2=Capacitors, Device Class L3="Ceramic Capacitors", Digikey Description="CAP CER 0.1UF 16V X7R 0603", Footprint Url=http://www.yageo.com/exep/pages/download/literatures/UPY-C_GEN_24.pdf, Height=0.9mm, Lead Free=Yes, Material=Ceramic, Mouser Description="Multilayer Ceramic Capacitor, CC Series, 0.1 - F, - 10%, X7R, 16 V, 0603 [1608 Metric]", Octopart=https://octopart.com/cc0603krx7r7bb104-yageo-192941, RoHS=TRUE, Voltage Rating="16 V"
C12: library part CMP-2006-02836-2, "Chip Multilayer Ceramic Capacitors for General Purpose, 0603, 2.2uF, X7R, 15%, 10%, 10V / GRM188R71A225KE15D", Case Code (Imperial)=0603, Case Code (Metric)=1608, Dielectric=X7R, Max Operating Temperature=125°C, Min Operating Temperature=-55°C, Package Quantity=1, Tolerance=10%, Voltage=10V, Capacitance=2.2uF, Case/Package=0603, Depth=0.8mm, Height=0.8mm, Lead Free="Lead Free", Length=1.6mm, Material=Ceramic, Mount="Surface Mount", Number of Pins=2, Packaging="Cut Tape", REACH SVHC="No SVHC", Termination=SMD/SMT, Thickness=0.035inch, Voltage Rating=10V, Voltage Rating (DC)=10V, Weight=7.1E-05oz, Width=0.031inch
C14 C17 C19 C23 C26 C28: library part CMP-08246-004641-1, "Multilayer Ceramic Capacitors 6.8μF ±10% 10V JB SMD 0805", Capacitance=6.8uF, Case Code (Imperial)=2012, Case Code (Metric)=5032, Case/Package=0805, Dielectric Material=Ceramic, Max Operating Temperature=85°C, Min Operating Temperature=-25°C, Package Quantity=4000, Tolerance=10%, Voltage Rating=10V, Lead Free="Lead Free", Length=0.079inch, Mount="Surface Mount", Packaging="Tape and Reel", RoHS Compliant=Yes, Series=C, Thickness=0.028inch, Voltage Rating (DC)=10V, Width=0.049inch
C15 C16 C21 C22 C24 C25 C30 C31: library part CMP-2000-05002-2, "CAP CER 0.1UF 16V X7R 0603", Capacitance="100 nF", Manufacturer=YAGEO, Package=CC0603-DA, Temperature="-55°C to +125°C", Temperature Characteristic=X7R, Temperature Coefficient=15%, Temperature Range High=+125°C, Temperature Range Low=-55°C, Tolerance=0.1, Voltage="16 V", Automotive=No, Category=Cap, ComponentLink2Description=Datasheet, ComponentLink2URL=http://www.yageo.com/documents/recent/UPY-GPHC_X7R_6.3V-to-50V_18.pdf, Device Class L1="Passive Components", Device Class L2=Capacitors, Device Class L3="Ceramic Capacitors", Digikey Description="CAP CER 0.1UF 16V X7R 0603", Footprint Url=http://www.yageo.com/exep/pages/download/literatures/UPY-C_GEN_24.pdf, Height=0.9mm, Lead Free=Yes, Manufacturer Part Number=CC0603KRX7R7BB104, Material=Ceramic, Mouser Description="Multilayer Ceramic Capacitor, CC Series, 0.1 - F, - 10%, X7R, 16 V, 0603 [1608 Metric]", Octopart=https://octopart.com/cc0603krx7r7bb104-yageo-192941, RoHS=TRUE, Voltage Rating="16 V"
C15 C32 C39 C43: library part CMP-06035-052255-1, "Ceramic Capacitor 0.1pF ±0.1pF 250VDC C0G 0603 Paper T/R", Capacitance=0.1pF, Case Code (Imperial)=0603, Case Code (Metric)=1608, Dielectric=C0G, Max Operating Temperature=125°C, Min Operating Temperature=-55°C, Package Quantity=4000, Voltage Rating=250V, Case/Package=0603, Depth=0.8mm, Height=0.7mm, Length=1.6mm, Mount="Surface Mount", Packaging="Tape and Reel", Radiation Hardening=No, Termination=SMD/SMT, Thickness=0.031inch, Voltage Rating (DC)=250V, Width=0.031inch
C18 C20 C27 C29: library part CMP-06035-007665-1, "Chip Multilayer Ceramic Capacitors for General Purpose, 1206, 16000pF, C0G, 30ppm/°C, 5%, 50V", Capacitance=16nF, Case Code (Imperial)=1206, Case Code (Metric)=3216, Dielectric=C0G, Max Operating Temperature=125°C, Min Operating Temperature=-55°C, Package Quantity=4000, Tolerance=5%, Voltage Rating=50V, Case/Package=1206, Depth=1.6mm, Height=0.85mm, Length=3.2mm, Mount="Surface Mount", Packaging="Tape and Reel", Radiation Hardening=No, Termination=SMD/SMT, Thickness=0.037inch, Voltage Rating (DC)=50V, Width=0.063inch
C33 C34 C35 C36 C37 C38 C40 C41 C42 C44 C45 C46: library part CMP-03422-000635-2, "CAP CER 3900PF 50V X7R 0603", Capacitance=3.9nF, Case Code (Imperial)=0603, Case Code (Metric)=1608, Dielectric=X7R, Dielectric Material=Ceramic, Insulation Resistance=100GR, Max Operating Temperature=125°C, Min Operating Temperature=-55°C, Package Quantity=4000, Tolerance=10%, Voltage=50V, Case/Package=0603, Construction=Flat, Depth=0.8mm, Halogen Free="Halogen Free", Height=0.8mm, Lead Free="Lead Free", Length=1.6mm, Mount="Surface Mount", Number of Pins=2, Packaging="Tape and Reel", Radiation Hardening=No, REACH SVHC="No SVHC", Resistor Type=Ceramic, RoHS Compliant=Yes, Series=CC, Termination=SMD/SMT, Thickness=0.035inch, Voltage Rating=50V, Voltage Rating (DC)=50V, Width=0.8mm
C47: library part CMP-2000-07316-1, "Tantalum Capacitor, 10 uF, +/- 20%, 10 V, -55 to 125 degC, 2-Pin SMD (M), RoHS, Tape and Reel TR8M106M010C2000", Capacitance=10µF, ESR (Equivalent Series Resistance)=2Ohm, Lifetime @ Temp.=-, Manufacturer=Vishay, Manufacturer Size Code=M, Operating Temperature=-55°C~125°C, Package / Case=0603(1608Metric), Package Description="2-Pin Surface Mount Device, Body 1.6 x 0.85 mm", Package Reference=TR8-M, Standard Package=1, Tolerance=±20%, Voltage - Rated=10V, Catalog Drawings=TR8SeriesTR8SeriesBottom, Category=Capacitors, Datasheet URL=http://www.vishay.com/docs/40114/tr8.pdf, Datasheet Version=03/2016, Family=TantalumCapacitors, Featured Product=TR8SeriesMoldedMicroTan™TantalumChipCapacitors, Features=GeneralPurpose, Height - Seated (Max)="0.035\"(0.89mm)", Lead Spacing=-, Manufacturer URL=http://www.vishay.com/, Mounting Technology=SurfaceMount, Mounting Type=SurfaceMount, Online Catalog=MICROTAN®TR8Series, Other Names=718-1673-6, Packaging=Digi-Reel®, Series=MICROTAN®TR8, Size / Dimension="0.063\"Lx0.033\"W(1.60mmx0.85mm)", Type=Molded
HDR1: library part HDR
J2: library part CMP-1682-00001-5, "Modular Jack, 6 Position, Right Angle, RoHS, Tray", Colour=Black, Current Rating="1.5 A", Manufacturer="TE Connectivity", Max Voltage Rating (AC)="150 V", Package Quantity=176, ComponentLink1Description="Manufacturer URL", ComponentLink1URL=http://www.te.com/, ComponentLink2Description=Datasheet, ComponentLink2URL=http://www.te.com/commerce/DocumentDelivery/DDEController?Action=srchrtrv&DocNm=5520470&DocType=Customer+Drawing&DocLang=English, Contact Finish=Gold, Contact Material=Bronze, Contact Plating=Gold, DatasheetVersion="Rev. B1, 03/2011", Height="16.13 mm", Housing Material=PBT, Lead Pitch="2.54 mm", Length="13.34 mm", Mount="Through Hole", Mounting Technology="Through Hole", PackageDescription="Female Header, Pitch 1.27 mm, 2 x 3 Position, Height 16.13 mm, Tail Length 4.32 mm", PackageReference=5520470-3, Packaging=Tray, Pins=6, REACH SVHC=Unknown, RoHSCompliant=true, Voltage Rating="150 V"
MCLR: library part CMP-1459-00005-1, "WS-TASV SMD Tact Switch 6.0X3.5 mm", Manufacturer="Wuerth Elektronik", ComponentLink1Description="Manufacturer URL", ComponentLink1URL=http://www.we-online.com, ComponentLink2Description=Datasheet, ComponentLink2URL=http://katalog.we-online.de/em/datasheet/434121043816.pdf, NoPins=02, PackageReference=434121043816, PartNumber=434121043816
R1: library part CMP-1011-00001-2, "RC0402JR-070RL", Manufacturer="Yageo / Phycomp", Part Number=RC0402JR-070RL
R2: library part CMP-2002-00609-3, "Chip Resistor, 1 MOhm, +/- 1%, 100 mW, -55 to 155 degC, 0402 (1005 Metric), RoHS, Tape and Reel / ERJ-2RKF1004X", Case Code (Imperial)=0402, Case Code (Metric)=1005, Manufacturer="Basic Passives", Max Operating Temperature="155 degC", Min Operating Temperature="-55 degC", Package Quantity=10000, PartNumber=ERJ-2RKF1004X, Power Rating="100 mW", Resistance="1 MOhm", Tolerance=1%, Voltage Rating="50 V", Case\/Package=0402, ComponentLink1Description="Manufacturer URL", ComponentLink1URL=http://www.panasonic.com/, ComponentLink2Description=Datasheet, ComponentLink2URL=http://industrial.panasonic.com/cdbs/www-data/pdf/RDA0000/AOA0000C86.pdf, DatasheetVersion=04/2015, Height="0.35 mm", Length="1 mm", Mount="Surface Mount", Mounting Technology="Surface Mount", PackageDescription="2-Pin Surface Mount Device, Body 1 x 0.5 mm", PackageReference=0402, Packaging="Tape and Reel", Pins=2, Radiation Hardening=No, REACH SVHC=Yes, RoHSCompliant=true, Weight=2.8E-05oz, Width="0.5 mm"
R3: library part CMP-2000-07588-1, "Chip Resistor, 10 KOhm, +/- 1%, 0.1 W, -55 to 155 degC, 0402 (1005 Metric), RoHS, Tape and Reel / ERJ2RKF1002X", Case Code (Imperial)=0402, Case Code (Metric)=1005, Manufacturer=Panasonic, Max Operating Temperature=155degC, Max Power Dissipation=100mW, Min Operating Temperature=-55degC, Package Description="2-Pin Surface Mount Device, Body 1 x 0.5 mm", Package Quantity=1, Package Reference=402, Resistance=10KOhm, Temperature Coefficient=100ppm\/degreesC, Tolerance=1%, Voltage Rating=50V, Case\/Package=0402, Composition=ThickFilm, Contact Plating=Tin, Datasheet URL=https://industrial.panasonic.com/cdbs/www-data/pdf/RDA0000/AOA0000C304.pdf, Datasheet Version=02/2017, Depth=0.5mm, Height=0.35mm, Lead Free=LeadFree, Length=1mm, Manufacturer URL=http://www.panasonic.com/, Military Standard=Not, Mount=SurfaceMount, Mounting Technology=SurfaceMount, Number of Pins=2, Number of Terminations=2, Packaging=TapeandReel, Power Rating=100mW, Radiation Hardening=No, REACH SVHC=NoSVHC, RoHSCompliant=True, Termination=SMD/SMT, Voltage Rating (DC)=50V, Width=0.02inch
R4 R5 R6 R7 R10 R11 R16 R17 R22 R23 R28 R29: library part CMP-2100-03671-1, "Chip Resistor, 1 KOhm, +/- 1%, 125 mW, -55 to 155 degC, 0805 (2012 Metric), RoHS, Tape and Reel", Case Code (Imperial)=0805, Case Code (Metric)=2012, Manufacturer=Yageo, Max Operating Temperature=155degC, Max Power Dissipation=125mW, Min Operating Temperature=-55degC, Package Description="2-Pin Surface Mounted Device, Body 2 x 1.25 mm", Package Quantity=1, Resistance=1KOhm, Temperature Coefficient=100ppm/degreesC, Tolerance=1%, Voltage Rating=150V, Case/Package=0805, Composition=ThickFilm, Datasheet URL=http://www.yageo.com/NewPortal/yageodocoutput?fileName=/pdf/R-Chip/PYu-RC_Group_51_RoHS_L_5.pdf, Datasheet Version="Rev. 5, 10/2016", Depth=1.25mm, Height=0.024inch, Lead Free=LeadFree, Length=0.079inch, Manufacturer URL=http://www.yageo.com/, Military Standard=Not, Number of Pins=2, Number of Terminations=2, Package Reference=0805, Packaging=TapeandReel, Power Rating=125mW, REACH SVHC=Unknown, RoHSCompliant=true, Termination=SMD/SMT, Voltage Rating (DC)=150V, Width=0.049inch
R8 R9 R14 R15 R20 R21 R26 R27: library part CMP-2001-04406-1, Manufacturer=Panasonic, Part Number=ERJ-6ENF1241V
R12 R13 R18 R19 R24 R25 R30 R31: library part CMP-2000-03264-2, "RES Thick Film, 35.7kΩ, 1%, 0.1W, 100ppm/°C, 0603", Case Code (Imperial)=0603, Case Code (Metric)=1608, Max Operating Temperature=155°C, Max Power Dissipation=100mW, Min Operating Temperature=-55°C, Package Quantity=10, Resistance=35.7kR, Temperature Coefficient=100ppm/°C, Tolerance=1%, Voltage Rating=75V, Case/Package=0603, Composition="Thick Film", Contact Plating=Tin, Depth=0.85mm, Features="Automotive AEC-Q200", Height=0.45mm, Length=1.55mm, Military Standard=Not, Number of Pins=2, Number of Terminations=2, Packaging="Tape and Reel", Power Rating=100mW, Radiation Hardening=No, Termination=Solder, Weight=7.1E-05oz, Width=0.033inch
U3: library part CMP-09093-000114-1, "IC DRIVER 1/0 8SOIC", Case/Package=SOIC, Max Operating Temperature=85°C, Max Supply Current=10mA, Max Supply Voltage=3.6V, Min Operating Temperature=-40°C, Min Supply Voltage=3V, Nominal Supply Current=7mA, Operating Supply Voltage=3.3V, Package Quantity=98, Data Rate=600Mbps, Height=1.5mm, Lead Free="Contains Lead", Length=5mm, Mount="Surface Mount", Number of Drivers=1, Number of Elements=1, Number of Pins=8, Number of Receivers=1, Operating Supply Current=7mA, Packaging=Rail/Tube, Propagation Delay=1.5ns, Radiation Hardening=No, REACH SVHC="No SVHC", RoHS Compliant=Yes, Series=-, Supply Current=7mA, Turn-On Delay Time=1.5ns, Width=4mm
U4 U5: library part CMP-0988-00132-2, "70-MHz High-Speed Programmable-Gain Amplifier, Dual, 0 to 70 degC, 28-pin SOP (PWP28), Green (RoHS & no Sb/Br)", Manufacturer="Texas Instruments", BW @ Acl(MHz)=100, Code_JEDEC=MO-153, ComponentLink1Description="Manufacturer URL", ComponentLink1URL=http://www.ti.com/, ComponentLink2Description=Datasheet, ComponentLink2URL=http://www.ti.com/general/docs/lit/getliterature.tsp?genericPartNumber=THS7002&fileType=pdf, ComponentLink3Description="Package Specification", ComponentLink3URL=http://www.ti.com/litv/pdf/mpds373, DatasheetVersion=SLOS214C, Disable=TRUE, Eco-Plan="Green (RoHS & no Sb/Br)", Iib(Max)(nA)=6000, Mounting Technology="Surface Mount", Number of Channels=2, PackageDescription="28-Pin Plastic Small Outline, Body 4.4 x 9.7 mm, Pitch 0.65 mm", PackageReference=PWP0028E, PackageVersion="4073225-6/I, 05/2011", PartNumber=THS7002CPWP, Slew Rate(Typ)(V/us)=85, SubFamily="Variable Gain Amplifier", Vio(Max)(mV)=7, Vn at Flatband(Typ)(nV/rtHz)=1.7, Vs(Max)(V)=32, Vs(Min)(V)=9
U6 U7 U8 U9: library part CMP-0359-00920-2, "Single Channel, Precision, Low Power Differential Operational Amplifier / SAR ADC Driver, RRIO, 180 MHz Typical GBW, 45 V/us Typical SR, 2.8 to 5.25 V, 8-Pin SOP (MS8-8), High Temperature / Automotive, Pb-Free", Linear Technology Part Number=LTC6362, Manufacturer="Linear Technology", Channels (#)=1, ComponentLink1Description="Manufacturer URL", ComponentLink1URL=http://www.linear.com/, ComponentLink2Description=Datasheet, ComponentLink2URL=http://cds.linear.com/docs/en/datasheet/6362fa.pdf, ComponentLink3Description="Package Specification", ComponentLink3URL=http://cds.linear.com/docs/en/packaging/05081610_G_SO8.pdf, DatasheetVersion="Rev. A", GBW (MHz) Typical=180, Is (mA) Typical=0.9, Mounting Technology="Surface Mount", PackageDescription="8-Lead Plastic Small Outline, Body 3.9 x 4.9 mm, Pitch 1.27 mm", PackageReference=LT-MS8-8, PackageVersion="Rev G", PartNumber=LTC6362HMS8#PBF, RevisionNote="URLs updated", RoHS=Pb-Free, SR (V/us) Typical=45, Type=DIFF, Vos (mV) Typical=0.05, Vs Max (V)=5.25, Vs Min (V)=2.8
X1: library part CMP-27762-013587-1, "Crystal 20MHz ±20ppm 18pF SMD-2 6mm x 3.5mm / ABM7-20.000MHZ-D2Y-T", Case/Package=CSMD, ESR (Equivalent Series Resistance)=50R, Frequency Stability=30ppm, Frequency Tolerance=20ppm, Load Capacitance=18pF, Max Operating Temperature=85°C, Min Operating Temperature=-40°C, Operating Frequency="20 MHz", Package Quantity=1000, Resistor Type=Ceramic, Contact Plating=Gold, Depth=3.5mm, Frequency=20MHz, Height=0.055inch, Lead Free="Lead Free", Length=6mm, Mount="Surface Mount", Number of Pins=2, Packaging="Tape and Reel", Radiation Hardening=No, Series=ABM7, Series Resistance=50R, Termination=SMD/SMT, Tolerance=20ppm, Width=0.138inch

## Free pads (board coordinates)
  round 30 hole 15: ""(1592.68,1678.32) ""(1592.68,1748.43) ""(1617.75,1643.27) ""(1618.29,1713.38) ""(1645.37,1748.43) ""(1645.38,1678.32) ""(1671.84,1643.27) ""(1674.15,1713.38) ""(1697.61,1678.32) ""(1697.98,1748.43)

## Via types
v1: diameter 26, hole 12, Top Layer to Bottom Layer, 94 vias
v2: diameter 42, hole 24, Top Layer to Bottom Layer, 8 vias
v3: diameter 60, hole 40, Top Layer to Bottom Layer, 2 vias

## Nets (pads, with @x,y where several pads share a name; then routed paths per layer and width w, separated by ;. In a path a pad name is that pad's centre, name@x,y a point inside that pad or via, vN(x,y) a via of type N, cw(c..) or ccw(c..) an arc to the next point about the centre after c; other vN are vias at no path point)
+3.3V: C1.2 C2.2 C3.2 C4.2 C8.2 C11.2 C47.1 C48.1 HDR1.8 J2.2 R3.2 U1.10 U1.19 U1.26 U1.35 U1.38 U1.57 U3.1 | length 1854.8
  Top Layer w6: C4.2@1268.83,1628.75 1280,1639.92 C4.2@1280,1640.71 ; C8.2@1678.89,1238.18 C8.2@1680.71,1240
  Top Layer w10: R3.2@735.75,1630 785,1630 v1(805,1650) ; J2.2@758.91,1373.63 J2.2@750.28,1365 750.28,1361.88 859.6,1252.56 989.27,1252.56 1001.12,1240.71 C1.2@1130,1240.71 1179.8,1240.71 1197.83,1258.74 U1.10@1245,1258.74 ; v1(1223.07,1614.39) 1224.39,1614.39 1250.71,1640.71 C4.2@1280,1640.71 ; C4.2@1280,1630.71 1280,1629.92 1408.39,1501.53 U1.57@1408.39,1461.5 ; v1(1305.35,1000.35) 1305.35,1044.65 C2.2@1305.71,1045 1309.69,1048.98 1309.69,1114.76 U1.19@1309.96,1115.04 ; U1.26@1447.76,1115.04 1447.76,1087.11 1459.29,1075.57 C3.2@1459.29,1045 1459.65,1044.65 v1(1459.65,1000.35) ; U1.38@1591.46,1239.06 C8.2@1669.13,1239.06 ; U1.35@1598.27,1180 1652.61,1180 1655.04,1177.57 1655.04,1175.04 v1(1660,1180) 1660,1181.82 1678.89,1200.71 C8.2@1678.89,1238.18 ; 1740,1626.89 1778.11,1626.89 v1(1800,1605) 1800,1600.67 1809.72,1590.95 1809.72,1552.72 1814.57,1547.87 C11.2@1826.38,1547.87 ; U3.1@2029.88,960 2029.88,999.88 2039.88,999.88 2068.41,1028.41 2068.41,1035.2 2100,1066.79 v1(2100,1070) ; C48.1@2034.53,1070 v1(2100,1070) ; C47.1@2192.36,1075 2189.86,1072.5 2102.5,1072.5 v1(2100,1070)
  Bottom Layer w10: v1@1302.7,1002.3 v1(1305.35,1000.35) v1@1305,1000 ; v1@1459.65,1000 v1(1459.65,1000.35)
+5V: C13.2 C19.1 C28.1 HDR1.6 U4.20 U5.20 U6.3 U7.3 U8.3 U9.3 | length 2264
  Top Layer w6: C19.1@892.22,3112.7 898.55,3119.03 C19.1@898.98,3119.03 ; U5.20@1139.25,3059.03 U5.20@1139.25,3088.72 ; v1@2004.26,2380.74 v1(2006.26,2378.74)
  Top Layer w10: U9.3@789.38,2473.44 U9.3@789.82,2473 ; C19.1@872.91,3093.4 889.52,3110 C19.1@894.92,3110 ; C19.1@898.98,3119.03 913.01,3105 1124.14,3105 1138.38,3090.76 1138.38,3089.6 U5.20@1139.25,3088.72 ; U7.3@1923.98,2463.44 U7.3@1927.42,2460 ; C13.2@1995,1733.43 2043.43,1733.43 2085,1775 v1(2085,1920) ; C28.1@1997.99,3099.03 2064.14,3099.03 2070,3093.17 v1(2070,3025) 2071.92,3026.92 2071.92,3053 2104.44,3085.53 2230.52,3085.53 2240.39,3075.65 2240.39,3047.89 U4.20@2244.25,3044.03 2240.39,3040.17 2243.86,3036.7 2243.86,2985.39 v1(2243.48,2985) ; U6.3@2479.38,2463.44 U6.3@2479.82,2463
  Top Layer w12: v1(580,3015) 815,3015 877.43,3077.43 877.43,3094.4 893.03,3110 898.98,3110 C19.1@898.98,3119.03 ; U9.3@789.82,2473 822,2473 824.43,2470.57 875,2420 v1(875,2385) ; U8.3@1349.38,2468.44 1349.94,2467.88 1382.13,2467.88 1430,2420 v1(1430,2380) ; U7.3@1927.42,2460 1960,2460 2006.26,2413.74 v1(2006.26,2378.74) ; U6.3@2479.82,2463 2512,2463 2545,2430 v1(2545,2340)
  Top Layer w15: 1740,1705.63 1839.8,1705.63 1867.6,1733.43 C13.2@1995,1733.43
+10.5V: C14.1 C15.1@1140.19,3430.47 C21.1 C23.1 C24.1 C30.1 HDR1.4 U4.8 U4.21 U5.8 U5.21 | length 1395.1
  Top Layer w15: C14.1@875,3479.02 898.13,3502.15 898.13,3545.1 916.02,3562.99 v1(916.02,3565.97) ; C21.1@1125,2949.53 1133.25,2957.78 1152.62,2957.78 1159.92,2965.08 1164.84,2970 ; v1(1125,3555) 1122.9,3552.9 1122.9,3524.93 1109.97,3512 1109.97,3458.72 1138.22,3430.47 1142.15,3430.47 1164.84,3407.78 U5.8@1164.84,3299.19 ; v1(1135,2820) 1135,2821.13 1164.84,2850.97 1164.84,2970 ; U5.21@1164.84,3059.03 1164.84,2970 ; v1(1871.02,3470.97) 1971.95,3470.97 C23.1@1975,3474.02 ; v1(2210,3560) 2208.76,3558.76 2208.76,3442.75 2237.01,3414.5 C24.1@2238.98,3414.5 ; C30.1@2223.98,2923.56 2223.98,2924.03 2268.98,2924.03 ; v1(2240,2805) 2240,2807.86 2268.98,2836.84 2268.98,2924.03 ; C24.1@2244.03,3411.42 2249.19,3406.25 2249.19,3403.44 2269.84,3382.79 U4.8@2269.84,3284.19 ; U4.21@2268.98,3049.03 2268.98,2924.03
-10V: C16.1 C17.1 C22.1 C25.1 C26.1 C31.1 HDR1.2 U4.7 U4.22 U5.7 U5.22 | length 1550.2
  Top Layer w12: U4.7@2295.43,3284.19 2298.29,3287.05 U4.7@2297.42,3290.21
  Top Layer w15: U5.22@1190.43,3059.03 1190.43,2970 ; U5.7@1190.43,3299.19 1190.43,3398.35 1223.03,3430.94 1226.97,3430.94 1275,3478.98 v1(1275,3560) ; v1(1220,2820) 1220,2821.68 1190.43,2851.25 1190.43,2970 ; C22.1@1230,2950 1221.75,2958.25 1202.19,2958.25 1190.43,2970 ; C17.1@1513.98,3463.05 1513.98,3463.48 1625,3574.5 v1(1625,3575) ; U4.22@2295.43,3044.03 2293.98,3044.03 2294.71,3043.3 2295.43,3042.57 2295.43,2924.03 ; U4.7@2297.42,3290.21 2297.42,3383.95 C25.1@2324,3410.52 ; C25.1@2328.98,3414.5 2328.98,3414.03 2330.47,3414.03 2359.19,3442.75 2359.19,3553.38 2330,3582.58 v1(2330,3585) ; v1(2330,2805) 2327.02,2805 2304.52,2827.5 2304.26,2827.5 2295.48,2836.29 2295.48,2851.6 2295.43,2851.64 2295.43,2924.03 ; C31.1@2338.98,2923.56 2338.98,2924.03 2295.43,2924.03 ; v1(2505,3575) 2507.1,3572.9 2540.11,3572.9 2593.98,3519.03 C26.1@2593.98,3473.05
A_GP0: A_GP0.1 A_GP0.2 U1.42 U4.28 | length 2767.5
  Top Layer w10: U1.42@1591.46,1317.8 1877.8,1317.8 2910,2350 2910,2880 2852.18,2937.82 A_GP0.2@2797.48,2937.82 ; U4.28@2448.98,3044.03 2448.98,2997.24 2508.4,2937.82 A_GP0.1@2732.52,2937.82
A_GP1: A_GP2.1@2732.52,2858.91 A_GP2.2@2797.48,2858.91 U1.43 U4.27 | length 2677
  Top Layer w10: U1.43@1591.46,1337.48 1872.48,1337.48 2895,2360 2895,2751.55 2797.48,2849.07 A_GP2.2@2797.48,2858.91 ; U4.27@2423.39,3044.03 2423.39,3001.61 2566.09,2858.91 A_GP2.1@2732.52,2858.91
A_GP2: A_GP2.1@2732.52,2780 A_GP2.2@2797.48,2780 U1.44 U4.26 | length 2633
  Top Layer w10: U1.44@1591.46,1357.17 1867.17,1357.17 2880,2370 2880,2718.15 2823.35,2774.79 2802.69,2774.79 A_GP2.2@2797.48,2780 ; U4.26@2397.8,3044.03 2399.69,3042.13 2399.69,3000.31 2620,2780 A_GP2.1@2732.52,2780
ADC_CH0_CH1_N: C44.1 C45.1 R30.2 | length 1244
  Top Layer w10: 1740,1764.69 1748.7,1764.69 1749.54,1763.84 1820.66,1763.84 2078.82,2022 2355.05,2022 2375,2041.95 2375,2104.14 2380.86,2110 2446.86,2110 2550.38,2213.52 2550.38,2222.02 2544.52,2227.88 2540.6,2227.88 2529.85,2238.63 2529.85,2242.56 2491.35,2281.07 2491.35,2296.63 2481.88,2306.1 R30.2@2479.38,2306.1 2476.88,2306.1 2465.28,2294.5 C44.1@2399.38,2294.5
  other v2: 2377.93,2107.07
ADC_CH0_CH1_P: C45.2 C46.1 R31.2 | length 1288.9
  Top Layer w10: 1740,1745 1748.7,1745 1749.54,1745.84 1828.11,1745.84 2086.27,2004 2362.51,2004 2383.51,2025 2454.14,2025 2460,2030.86 2460,2097.68 2568.38,2206.06 2568.38,2222.02 2574.24,2227.88 2578.16,2227.88 2588.91,2238.63 C45.2@2588.91,2240.6 2588.91,2242.56 2632.41,2286.07 2632.41,2299.03 2641.88,2308.5 R31.2@2644.38,2308.5 2646.88,2308.5 2665.88,2289.5 C46.1@2729.19,2289.5
  other v2: 2457.07,2027.93
ADC_CH2_CH3_N: C40.1 C41.2 R24.2 | length 794.7
  Top Layer w10: 1694.72,1790.28 1694.72,1798.98 1695.57,1799.82 1695.57,1854.47 1860,2018.91 1860,2074.14 1865.86,2080 1921.85,2080 1995.45,2153.6 1995.45,2205.46 1989.59,2211.31 1985.67,2211.31 1974.92,2222.06 C41.2@1974.92,2224.03 1974.92,2256.36 1926.48,2304.8 R24.2@1923.98,2304.8 1921.47,2304.8 1910.64,2293.97 C40.1@1838.98,2293.97
  other v2: 1862.93,2077.07
ADC_CH2_CH3_P: C41.1 C42.1 R25.2 | length 798.6
  Top Layer w10: 1714.41,1790.28 1714.41,1798.98 1713.57,1799.82 1713.57,1847.02 1869.61,2003.06 1932.2,2003.06 1938.06,2008.92 1938.06,2070.76 2013.45,2146.14 2013.45,2205.46 2019.31,2211.31 2023.23,2211.31 2033.98,2222.06 2033.98,2226 2088.98,2281 R25.2@2088.98,2304.8 2091.48,2304.8 2101.78,2294.5 C42.1@2173.98,2294.5
  other v2: 1935.13,2005.99
ADC_CH4_CH5_N: C36.1 C37.1 R18.2 | length 746.9
  Top Layer w10: C36.1@1269.38,2299.5 1271.35,2299.5 1287.2,2315.35 R18.2@1354.19,2315.35 1356.7,2315.35 1393.7,2278.34 1393.7,2249.78 C37.1@1404.45,2239.03 1404.45,2237.06 1415.2,2226.31 1419.12,2226.31 1424.98,2220.46 1424.98,2129.98 1384.14,2089.14 v2(1384.14,2080.86) 1422.43,2042.57 1422.43,2024.59 1577.46,1869.56 1577.46,1799.82 1576.61,1798.98 1576.61,1790.28
ADC_CH4_CH5_P: C37.2 C38.1 R19.2 | length 747.8
  Top Layer w10: 1596.3,1790.28 1596.3,1798.98 1595.46,1799.82 1595.46,1877.02 1440.43,2032.04 1440.43,2040.43 1480.86,2080.86 1480.86,2089.14 1442.98,2127.02 1442.98,2220.46 1448.83,2226.31 1452.76,2226.31 1474.25,2247.81 1474.25,2275.08 1502.01,2302.83 1502.01,2305.33 1511.47,2314.8 R19.2@1513.98,2314.8 1516.48,2314.8 1535.49,2295.79 C38.1@1599.19,2295.79
  other v2: 1480.86,2085
ADC_CH6_CH7_N: C33.1 C34.2 R12.2 | length 1136.9
  Top Layer w10: C33.1@714.16,2304.5 780.63,2304.5 796.47,2320.35 R12.2@798.98,2320.35 801.48,2320.35 833.7,2288.13 833.7,2261.34 C34.2@844.45,2250.6 844.45,2248.63 855.2,2237.88 859.12,2237.88 864.98,2232.02 864.98,2216.06 923.43,2157.61 924.47,2157.61 1028.21,2053.87 1136.13,2053.87 v2(1175,2015) 1209.91,2049.91 1218.2,2049.91 1520.76,1747.34 1539.98,1747.34 1542.32,1745 1551.02,1745
ADC_CH6_CH7_P: C34.1 C35.1 R13.2 | length 1124.2
  Top Layer w10: C35.1@1039.19,2300.79 1037.22,2300.79 1013.21,2324.8 R13.2@954.38,2324.8 951.88,2324.8 942.41,2315.33 942.41,2291.47 903.5,2252.56 C34.1@903.5,2250.6 903.5,2248.63 892.76,2237.88 888.83,2237.88 882.98,2232.02 882.98,2223.52 936.16,2170.34 1035.36,2071.13 1136.13,2071.13 v2(1175,2110) 1175,2105.67 1210.67,2070 1219.32,2070 1526.98,1762.34 1539.98,1762.34 1542.32,1764.69 1551.02,1764.69